# EAGLE board Welder_PSU.PCB (EAGLE 9.6.2), part 1 of 3
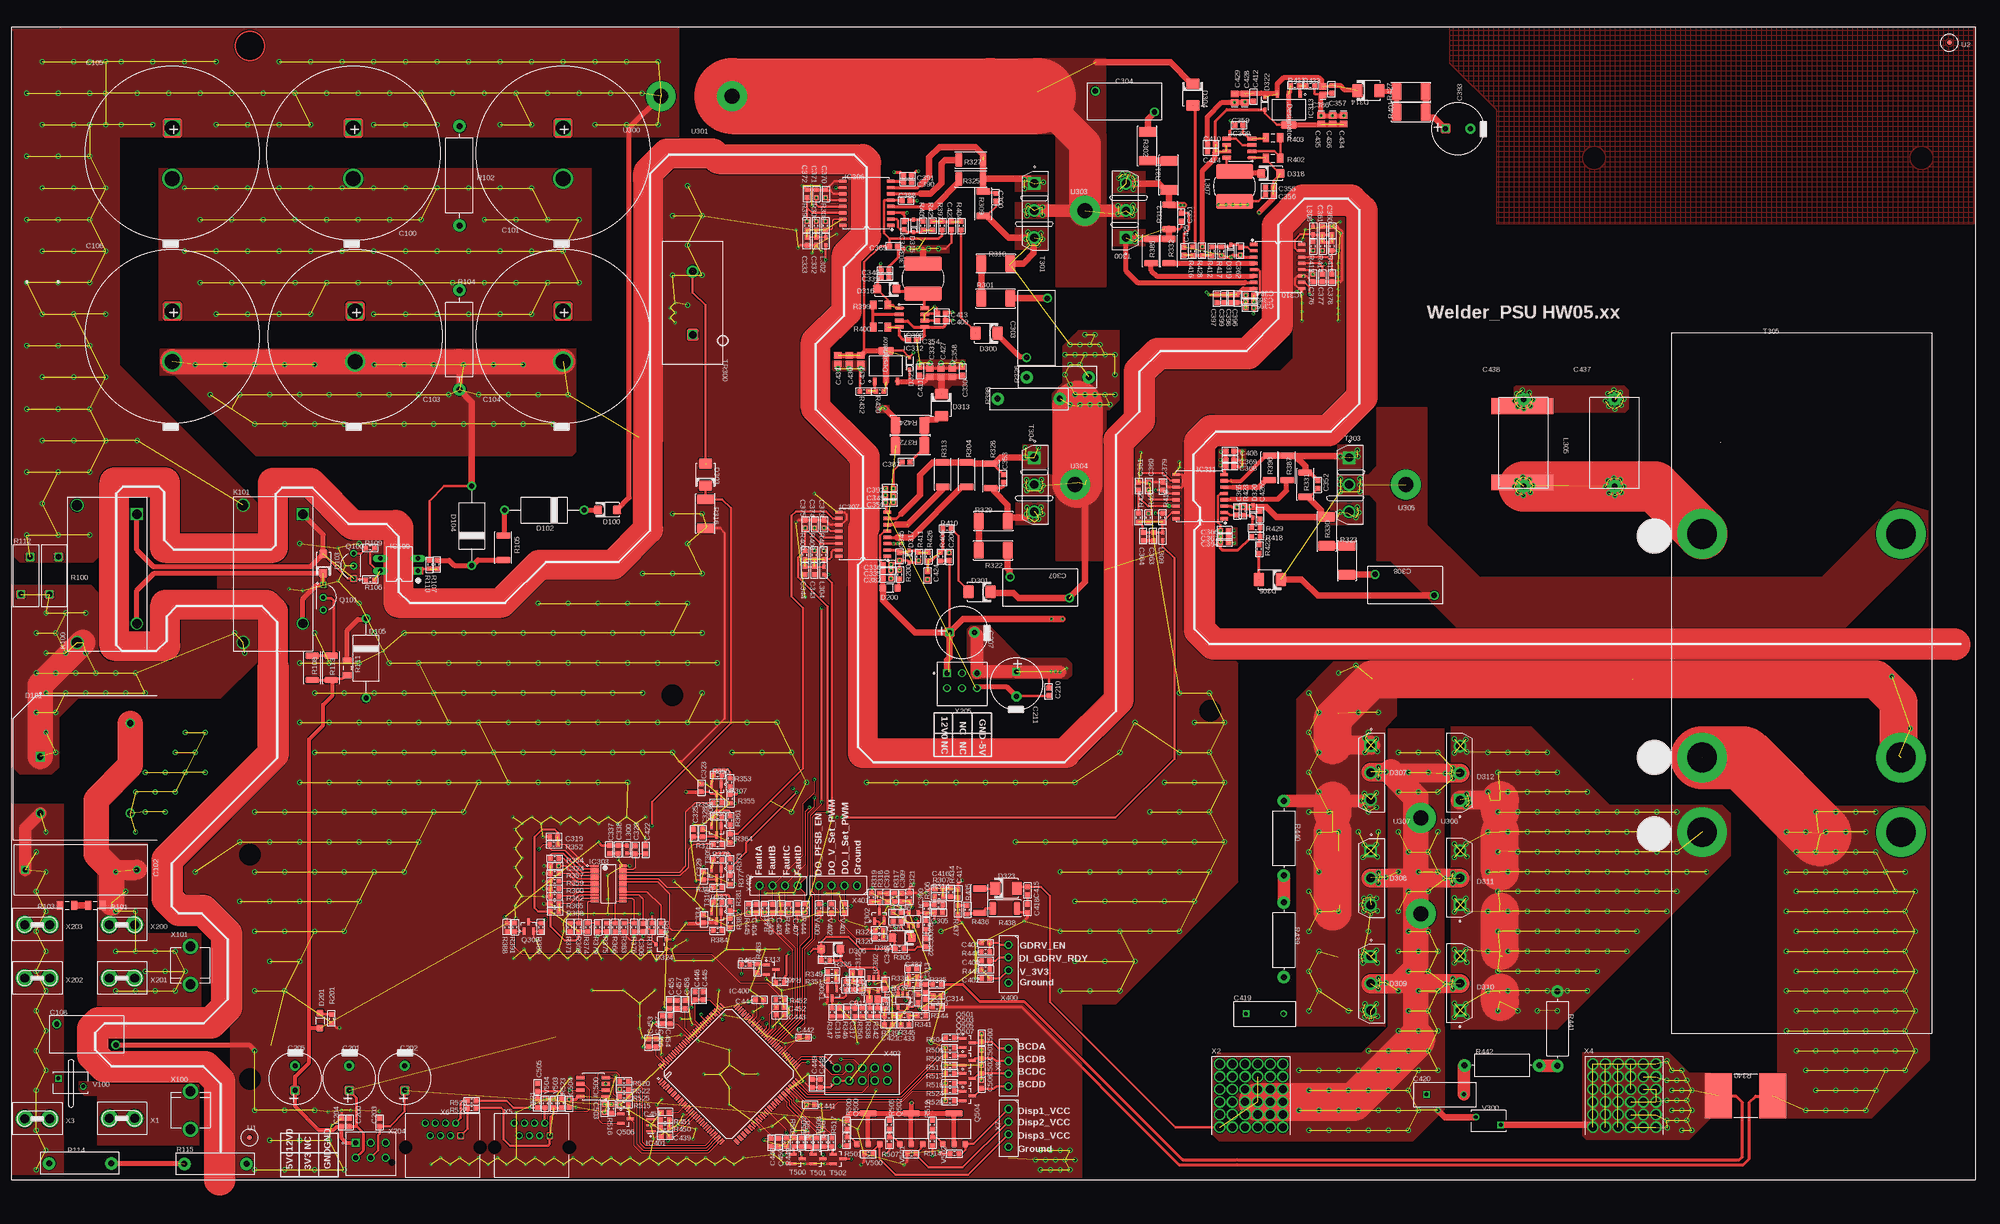
[diagram p0: board, top side]
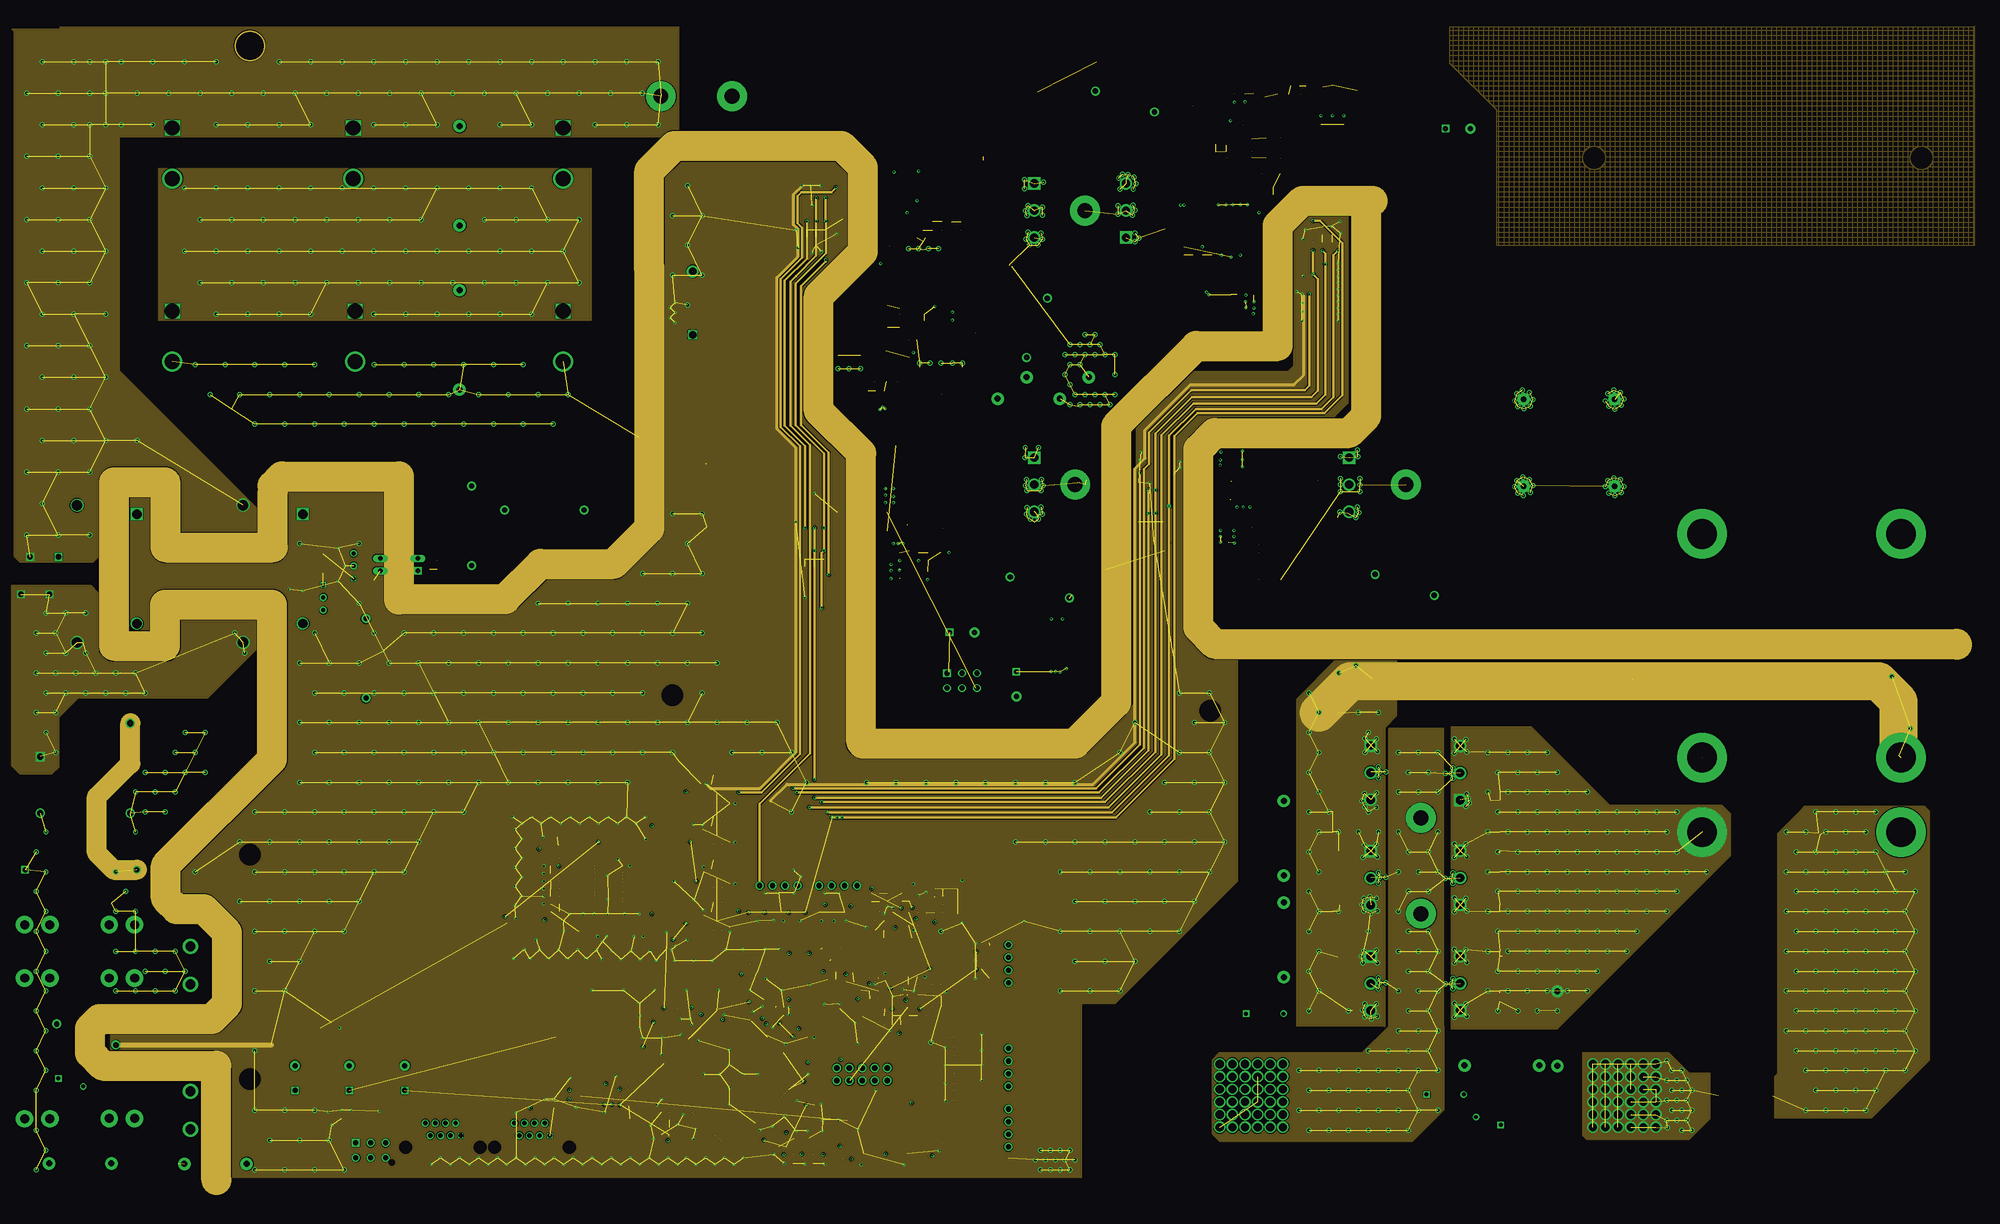
[diagram p1: board, inner layer Route2]
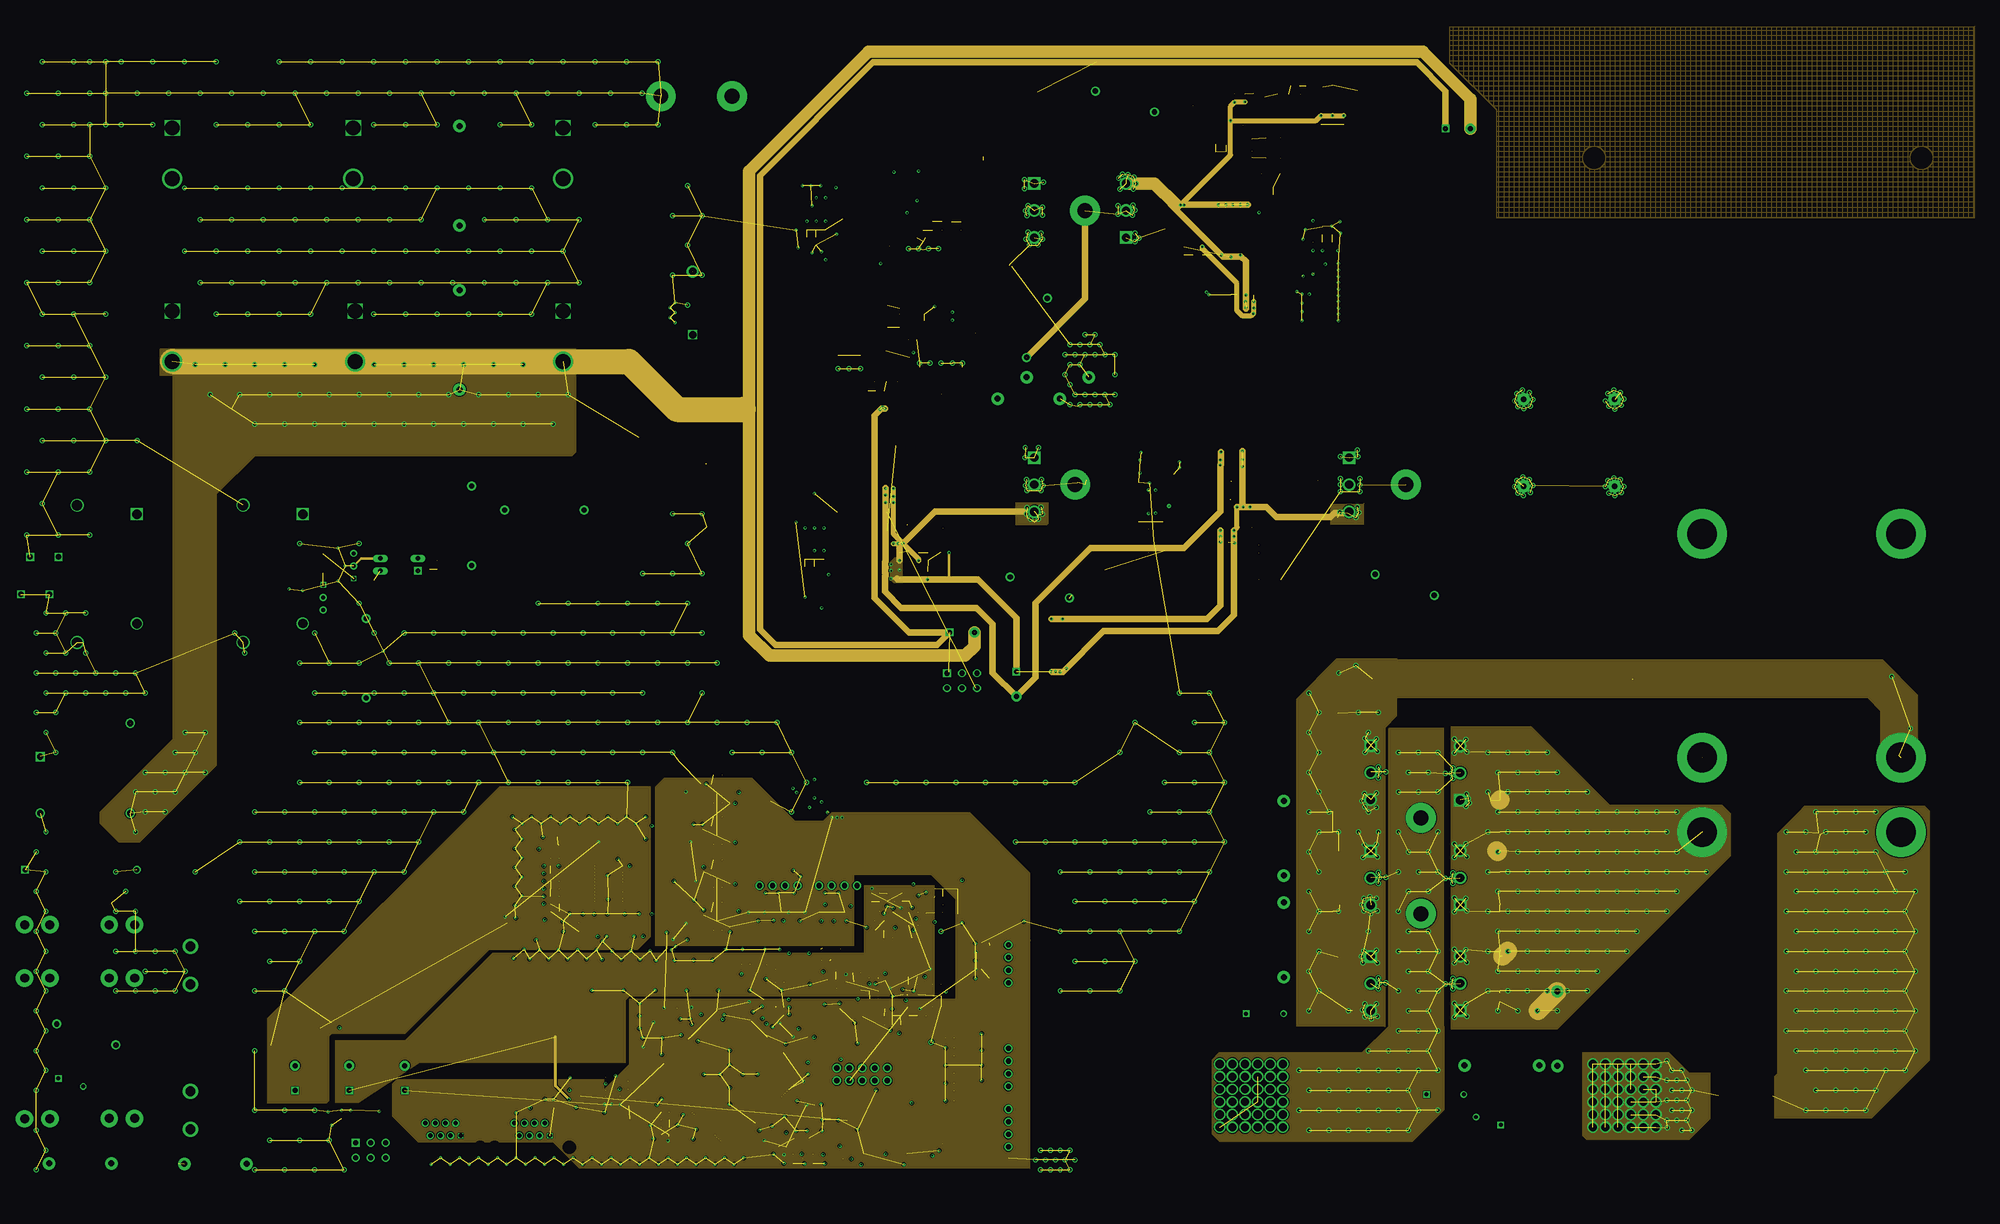
[diagram p2: board, inner layer Route3]
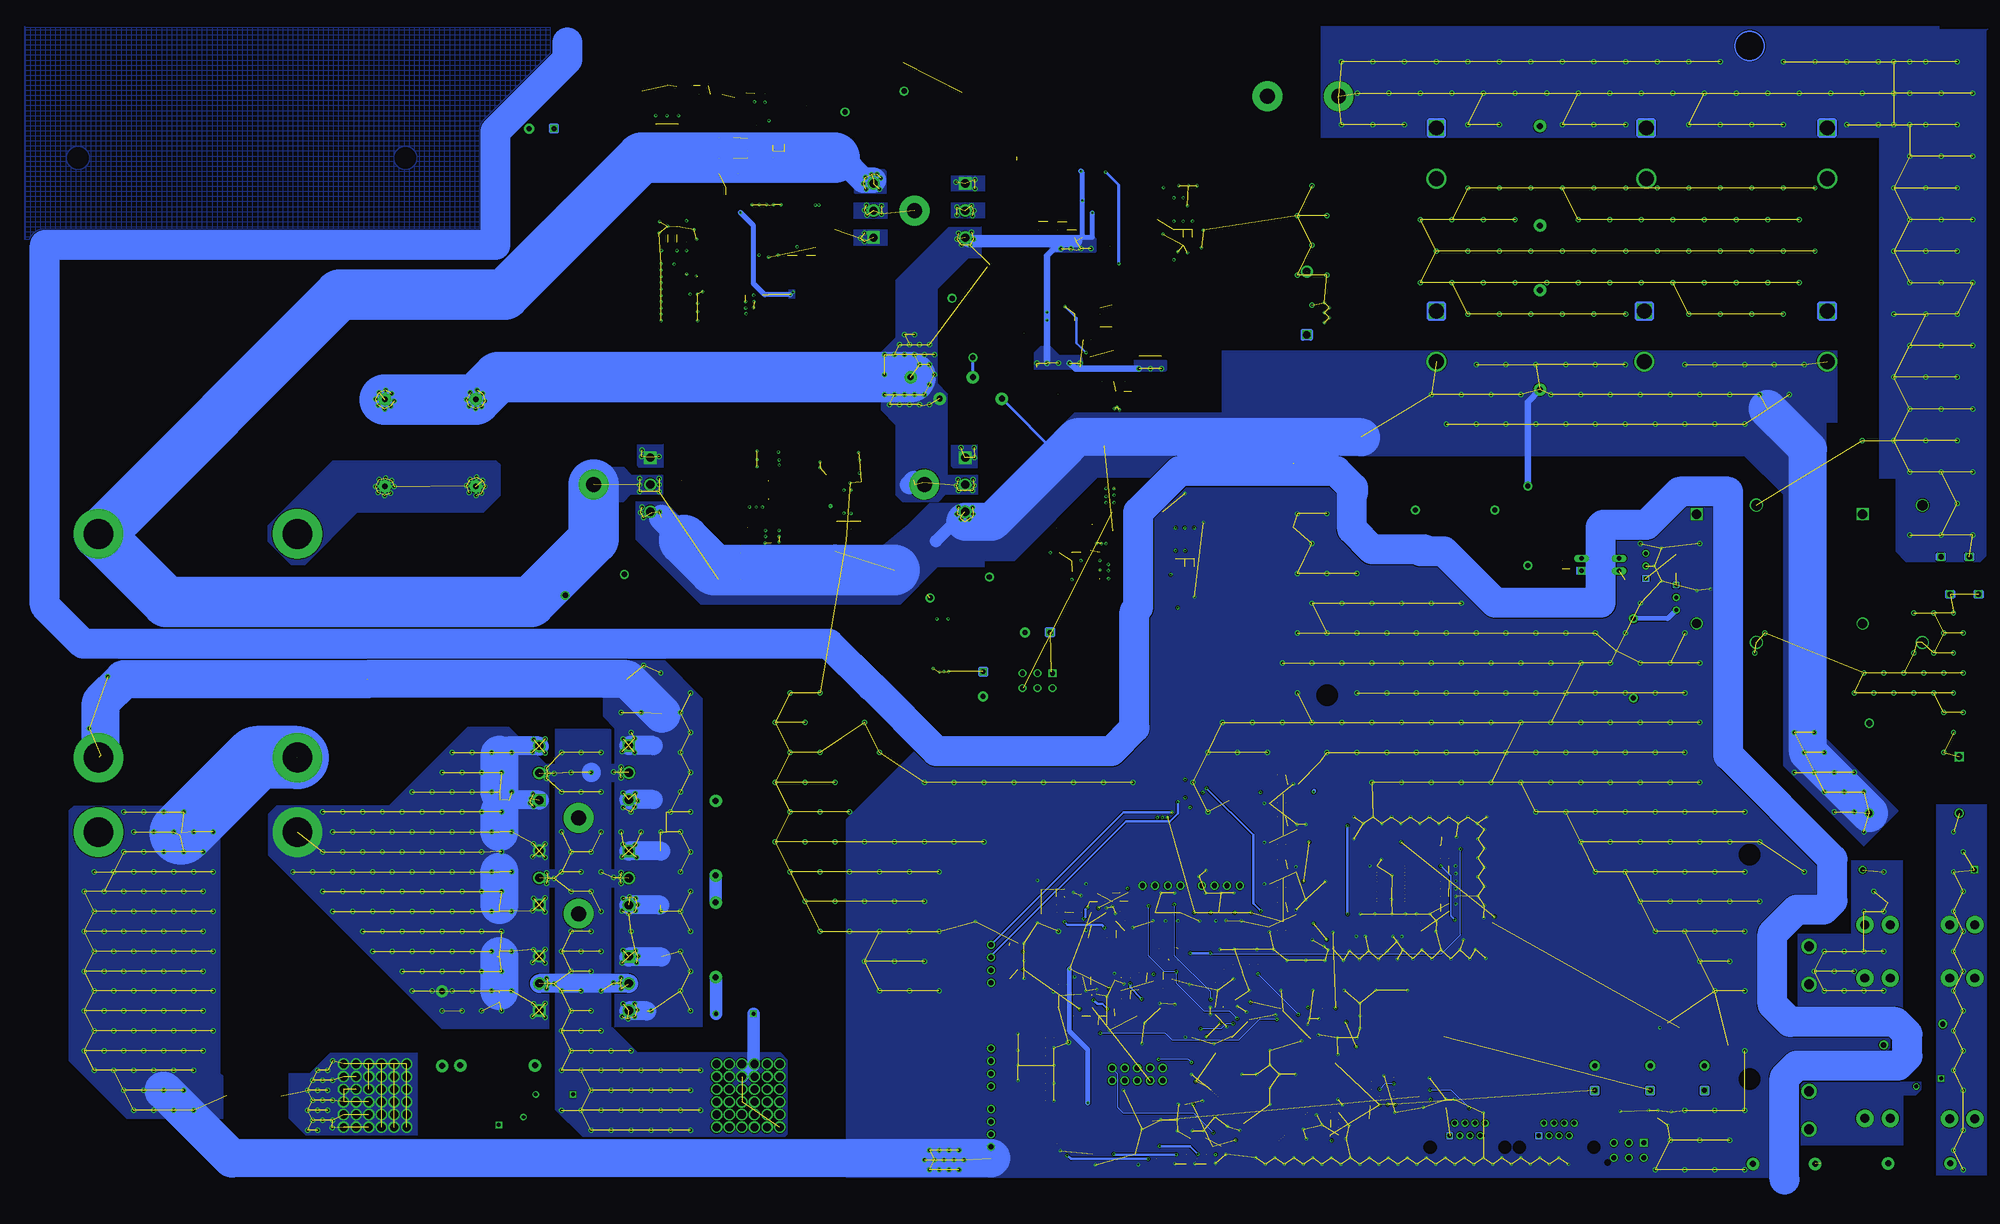
[diagram p3: board, bottom side, seen from below]

No outline drawn. Coordinates in mm, seen from the top.
Copper layers (1*16): Top 0.035mm / dielectric 1.5mm / Bottom 0.035mm
Design rules "Welder_PSU": minimum track width 6mil, minimum drill 0.35mm, track to track 6mil, track to pad 6mil, pad to pad 6mil, via to via 6mil, smd to smd 6mil, copper to edge 40mil, drill to drill 6mil, minimum pad ring 0mil, minimum via ring 0mil, stop-mask expansion 4mil, vias tented up to drill 0mil, thermal gap 10mil

## Footprints (pad centres in the part's own frame; a part is rotated, then mirrored left to right if it is on the bottom)
CAPACITOR-ELKO-400V-RM10-35X76PRIMARY = drill 3 pad 3.057 square: 1 -5.08,0 | drill 3 pad 4: 2 5.08,0
CP22.5X10X26.5_1PRIMARY = drill 1 pad 1.55 square: 1 -11.25,0 | drill 1 pad 1.55: 2 11.25,0
CAPACITOR-ELKO-400V-RM10-35X77PRIMARY = drill 3 pad 3.057 square: 1 -5.08,0 | drill 3 pad 4: 2 5.08,0
CAPACITOR-ELKO-400V-RM10-35X74PRIMARY = drill 3 pad 3.057 square: 1 -5.08,0 | drill 3 pad 4: 2 5.08,0
CAPACITOR-FILM-RM12.5MM-12MM_1PRIMARY = drill 1.1 pad 1.8: 1 6,-2.5; 2 -5.9,1.7
EIA0603_3PRIMARY = smd 1 x 1: 1 -0.8,0; 2 0.8,0
CAPACITOR-ELKO-RM5-10X20_6PRIMARY = drill 1 pad 1.538 square: 1 -2.5,0 | drill 1 pad 2: 2 2.5,0
CAPACITOR-ELKO-RM5-10X20_5PRIMARY = drill 1 pad 1.538 square: 1 -2.5,0 | drill 1 pad 2: 2 2.5,0
CAPACITOR-ELKO-RM5-10X20_4PRIMARY = drill 1 pad 1.538 square: 1 -2.5,0 | drill 1 pad 2: 2 2.5,0
CAPACITOR-ELKO-RM5-10X20_3PRIMARY = drill 1 pad 1.538 square: 1 -2.5,0 | drill 1 pad 2: 2 2.5,0
CAPACITOR-ELKO-RM5-10X20_2PRIMARY = drill 1 pad 1.538 square: 1 -2.5,0 | drill 1 pad 2: 2 2.5,0
EIA0805_1PRIMARY = smd 1.3 x 1.5: 1 -0.85,0; 2 0.85,0
CAPACITOR-ELKO-RM5-10X20_1PRIMARY = drill 1 pad 1.538 square: 1 -2.5,0 | drill 1 pad 2: 2 2.5,0
C_DISC_P7.5D12_1PRIMARY = drill 0.8 pad 1.3 square: 1 -3.75,0 | drill 0.8 pad 1.3: 2 3.75,0
CAPACITOR-FILM-RM17.5-28X17.55PRIMARY = drill 1.1 pad 2.5: 1 -8.75,0; 2 8.75,0
SMA_2PRIMARY = smd 1.75 x 1.75: 1 -1.925,0; 2 1.925,0
GBPC3510W_1PRIMARY = drill 1.25 pad 1.9 square: 1 2.35,9.05 | drill 1.25 pad 1.9: 2 9.05,-9.05; 3 -9.05,-9.05; 4 -9.05,9.05 | drill 5.59 pad 5.59: 5 0,0
DO-201AD_1PRIMARY = drill 1 pad 1.8: 1 -8,0; 2 8,0
1206LED_1PRIMARY = smd 1.4 x 1.5: 1 -1.5,0; 2 1.5,0
SMB_1PRIMARY = smd 2.16 x 2.74: 1 -2.21,0; 2 2.21,0
SMA_1PRIMARY = smd 1.75 x 1.75: 1 -1.925,0; 2 1.925,0
TO247-AD_1PRIMARY = drill 1.65 pad 2.5 square: 1 -0.22,5.44 | drill 1.65 pad 2.5: 2 -0.22,0; 3 -0.22,-5.44
SOD323_1PRIMARY = smd 0.6 x 0.8: 1 0,-1.25; 2 0,1.25
SOT23DUALDIODE_1PRIMARY = smd 0.8 x 0.9: 1 -0.95,-1.05; 2 0.95,-1.05; 3 0,1.05
P:EX157Y157D1571 = drill 4 pad 4: 1 0,0
DIP04_1PRIMARY = drill 0.9 pad 1.499 square: 1 -3.81,1.27 | drill 0.9 pad 1.499 long: 2 -3.81,-1.27; 3 3.81,-1.27; 4 3.81,1.27
SOT23-5_1PRIMARY = smd 0.6 x 0.99: 1 -0.953,-1.295; 2 0,-1.295; 3 0.953,-1.295 | smd 0.69 x 0.99: 4 0.953,1.295; 5 -0.953,1.295
TSSOP24_1PRIMARY = smd 1.655 x 0.381: 1 -2.825,3.575; 2 -2.825,2.925; 3 -2.825,2.275; 4 -2.825,1.625; 5 -2.825,0.975; 6 -2.825,0.325; 7 -2.825,-0.325; 8 -2.825,-0.975; 9 -2.825,-1.625; 10 -2.825,-2.275; 11 -2.825,-2.925; 12 -2.825,-3.575; 13 2.825,-3.575; 14 2.825,-2.925; 15 2.825,-2.275; 16 2.825,-1.625; 17 2.825,-0.975; 18 2.825,-0.325; 19 2.825,0.325; 20 2.825,0.975; 21 2.825,1.625; 22 2.825,2.275; 23 2.825,2.925; 24 2.825,3.575
SOIC16_WIDE_HV_1PRIMARY = smd 1.65 x 0.6: 1 -4.855,4.445; 2 -4.855,3.175; 3 -4.855,1.905; 4 -4.855,0.635; 5 -4.855,-0.635; 6 -4.855,-1.905; 7 -4.855,-3.175; 8 -4.855,-4.445; 9 4.855,-4.445; 10 4.855,-3.175; 11 4.855,-1.905; 12 4.855,-0.635; 13 4.855,0.635; 14 4.855,1.905; 15 4.855,3.175; 16 4.855,4.445
SOIC8_1PRIMARY = smd 1.9 x 0.72: 1 -2.54,1.905; 2 -2.54,0.635; 3 -2.54,-0.635; 4 -2.54,-1.905; 5 2.54,-1.905; 6 2.54,-0.635; 7 2.54,0.635; 8 2.54,1.905
SOT223_TI_1PRIMARY = smd 1.45 x 0.9: 1 -3.075,2.3; 3 -3.075,0; 4 -3.075,-2.3 | smd 1.45 x 3.15: 2 3.075,0
QFP-144-M_1PRIMARY = smd 1.45 x 0.3: 1 -10.725,8.75; 2 -10.725,8.25; 3 -10.725,7.75; 4 -10.725,7.25; 5 -10.725,6.75; 6 -10.725,6.25; 7 -10.725,5.75; 8 -10.725,5.25; 9 -10.725,4.75; 10 -10.725,4.25; 11 -10.725,3.75; 12 -10.725,3.25; 13 -10.725,2.75; 14 -10.725,2.25; 15 -10.725,1.75; 16 -10.725,1.25; 17 -10.725,0.75; 18 -10.725,0.25; 19 -10.725,-0.25; 20 -10.725,-0.75; 21 -10.725,-1.25; 22 -10.725,-1.75; 23 -10.725,-2.25; 24 -10.725,-2.75; 25 -10.725,-3.25; 26 -10.725,-3.75; 27 -10.725,-4.25; 28 -10.725,-4.75; 29 -10.725,-5.25; 30 -10.725,-5.75; 31 -10.725,-6.25; 32 -10.725,-6.75; 33 -10.725,-7.25; 34 -10.725,-7.75; 35 -10.725,-8.25; 36 -10.725,-8.75; 73 10.725,-8.75; 74 10.725,-8.25; 75 10.725,-7.75; 76 10.725,-7.25; 77 10.725,-6.75; 78 10.725,-6.25; 79 10.725,-5.75; 80 10.725,-5.25; 81 10.725,-4.75; 82 10.725,-4.25; 83 10.725,-3.75; 84 10.725,-3.25; 85 10.725,-2.75; 86 10.725,-2.25; 87 10.725,-1.75; 88 10.725,-1.25; 89 10.725,-0.75; 90 10.725,-0.25; 91 10.725,0.25; 92 10.725,0.75; 93 10.725,1.25; 94 10.725,1.75; 95 10.725,2.25; 96 10.725,2.75; 97 10.725,3.25; 98 10.725,3.75; 99 10.725,4.25; 100 10.725,4.75; 101 10.725,5.25; 102 10.725,5.75; 103 10.725,6.25; 104 10.725,6.75; 105 10.725,7.25; 106 10.725,7.75; 107 10.725,8.25; 108 10.725,8.75 | smd 0.3 x 1.45: 37 -8.75,-10.725; 38 -8.25,-10.725; 39 -7.75,-10.725; 40 -7.25,-10.725; 41 -6.75,-10.725; 42 -6.25,-10.725; 43 -5.75,-10.725; 44 -5.25,-10.725; 45 -4.75,-10.725; 46 -4.25,-10.725; 47 -3.75,-10.725; 48 -3.25,-10.725; 49 -2.75,-10.725; 50 -2.25,-10.725; 51 -1.75,-10.725; 52 -1.25,-10.725; 53 -0.75,-10.725; 54 -0.25,-10.725; 55 0.25,-10.725; 56 0.75,-10.725; 57 1.25,-10.725; 58 1.75,-10.725; 59 2.25,-10.725; 60 2.75,-10.725; 61 3.25,-10.725; 62 3.75,-10.725; 63 4.25,-10.725; 64 4.75,-10.725; 65 5.25,-10.725; 66 5.75,-10.725; 67 6.25,-10.725; 68 6.75,-10.725; 69 7.25,-10.725; 70 7.75,-10.725; 71 8.25,-10.725; 72 8.75,-10.725; 109 8.75,10.725; 110 8.25,10.725; 111 7.75,10.725; 112 7.25,10.725; 113 6.75,10.725; 114 6.25,10.725; 115 5.75,10.725; 116 5.25,10.725; 117 4.75,10.725; 118 4.25,10.725; 119 3.75,10.725; 120 3.25,10.725; 121 2.75,10.725; 122 2.25,10.725; 123 1.75,10.725; 124 1.25,10.725; 125 0.75,10.725; 126 0.25,10.725; 127 -0.25,10.725; 128 -0.75,10.725; 129 -1.25,10.725; 130 -1.75,10.725; 131 -2.25,10.725; 132 -2.75,10.725; 133 -3.25,10.725; 134 -3.75,10.725; 135 -4.25,10.725; 136 -4.75,10.725; 137 -5.25,10.725; 138 -5.75,10.725; 139 -6.25,10.725; 140 -6.75,10.725; 141 -7.25,10.725; 142 -7.75,10.725; 143 -8.25,10.725; 144 -8.75,10.725
RESONATOR_CSTNE8M00G520000R0_1PRIMARY = smd 0.4 x 1.9: 1 -1.2,0; 2 0,0; 3 1.2,0
ALFG2PF09_1PRIMARY = drill 1.9 pad 2.4 square: 1 0,0 | drill 1.9 pad 2.4: 2 22,0 | drill 2.1 pad 2.6: 3 -1.8,-12; 4 25.8,-12
FERRITE_SMD_0603_1PRIMARY = smd 0.85 x 0.7: 1 -0.775,0; 2 0.775,0
SRN8040TA_1PRIMARY = smd 3 x 7.5: 1 -3,0; 2 3,0
SRP1770TA_1PRIMARY = smd 3.15 x 12.5: 1 -7.675,0; 2 7.675,0
TO-92_1PRIMARY = drill 0.8 pad 1.071 square: 1 0,2.54 | drill 0.8 pad 1.4: 2 0,0; 3 0,-2.54
SOT23-3N_1PRIMARY = smd 1.5 x 0.6: 1 -0.95,0.95; 2 -0.95,-0.95; 3 0.95,0
SOT223_1PRIMARY = smd 1.2 x 1.4: 1 -2.3,-3.1; 3 0,-3.1; 4 2.3,-3.1 | smd 3.5 x 1.4: 2 0,3.1
SOT23-3N_2PRIMARY = smd 1.5 x 0.6: 1 -0.95,0.95; 2 -0.95,-0.95; 3 0.95,0
NTC_D10_P7.5_1PRIMARY = drill 1.1 pad 1.538 square: 1 -3.75,0.925; 2 3.75,-0.925
EIA1206_1PRIMARY = smd 1.3 x 1.8: 1 -1.45,0; 2 1.45,0
RES-RM20-RSF2W_1PRIMARY = drill 1.2 pad 2.5: 1 -10,0; 2 10,0
2010RESISTOR_1PRIMARY = smd 1.4 x 2.8: 1 -2.45,0; 2 2.45,0
EIA0603_2PRIMARY = smd 0.9 x 1: 1 -0.85,0; 2 0.85,0
RES-RM12.5-VR37_1PRIMARY = drill 1.2 pad 2.5: 1 -6.25,0; 2 6.25,0
2512RESISTOR_1PRIMARY = smd 2 x 3.5: 1 -2.9,0; 2 2.9,0
WSLP3921L_1PRIMARY = smd 5.4 x 9: 1 -5.5,0; 2 5.5,0
EIA0603_1PRIMARY = smd 0.9 x 1: 1 -0.85,0; 2 0.85,0
RES-RM15-RSF1W_1PRIMARY = drill 1.2 pad 2.5: 1 -7.5,0; 2 7.5,0
TO247-AC_2PRIMARY = drill 1.65 pad 2.5 square: 1 -0.22,5.44 | drill 1.65 pad 2.5: 2 -0.22,0; 3 -0.22,-5.44
TO247-AC_1PRIMARY = drill 1.65 pad 2.5 square: 1 -0.22,5.44 | drill 1.65 pad 2.5: 2 -0.22,0; 3 -0.22,-5.44
11-0060-A_1PRIMARY = drill 6 pad 10: 1 -20,30; 2 -20,-15; 3 -20,-30; 4 20,-30; 5 20,-15; 6 20,30
CST206-2A_1PRIMARY = drill 1.5 pad 1.83 square: 1 -6.35,0 | drill 1.5 pad 2.4: 2 6.35,0
FIDUCIALMARKER_1PRIMARY = smd 1 x 1: 1 0,0
PAD-3.0X6.0MM_7PRIMARY = drill 3 pad 6: 1 15.087,0
PAD-3.0X6.0MM_6PRIMARY = drill 3 pad 6: 1 0,15.31
PAD-3.0X6.0MM_5PRIMARY = drill 3 pad 6: 1 0.105,17.636
PAD-3.0X6.0MM_4PRIMARY = drill 3 pad 6: 1 3.96,8.553
PAD-3.0X6.0MM_3PRIMARY = drill 3 pad 6: 1 40,0
PAD-3.0X6.0MM_2PRIMARY = drill 3 pad 6: 1 1,0
PAD-3.0X6.0MM_1PRIMARY = drill 3 pad 6: 1 10,-19.25
EPCOS_B72205S0271K101_1PRIMARY = drill 0.8 pad 1.3 square: 1 -2.5,0.8 | drill 0.8 pad 1.3: 2 2.5,-0.8
X01_FASTONPCBTAB6.3MM1.8MMHO87PRIMARY = drill 1.8 pad 3.5: 1 2.539,-0.001; 2 -2.541,-0.001
X01_M10_7461061_1PRIMARY = drill 1.65 pad 2.3: 1 6.35,6.35; 2 3.81,6.35; 3 1.27,6.35; 4 -1.27,6.35; 5 -3.81,6.35; 6 -6.35,6.35; 7 6.35,3.81; 8 6.35,1.27; 9 6.35,-6.35; 10 6.35,-3.81; 11 6.35,-1.27; 12 -6.35,3.81; 13 -3.81,3.81; 14 -1.27,3.81; 15 1.27,3.81; 16 3.81,3.81; 17 3.81,1.27; 18 3.81,-1.27; 19 3.81,-3.81; 20 3.81,-6.35; 21 1.27,1.27; 22 -1.27,1.27; 23 -3.81,1.27; 24 -6.35,1.27; 25 1.27,-1.27; 26 -1.27,-1.27; 27 -3.81,-1.27; 28 -6.35,-1.27; 29 1.27,-3.81; 30 -1.27,-3.81; 31 -3.81,-3.81; 32 -6.35,-3.81; 33 1.27,-6.35; 34 -1.27,-6.35; 35 -3.81,-6.35; 36 -6.35,-6.35
X08_615008148521_1PRIMARY = drill 0.9 pad 1.071 square: 1 3.57,1.875 | drill 0.9 pad 1.4: 2 2.55,4.415; 3 1.53,1.875; 4 0.51,4.415; 5 -0.51,1.875; 6 -1.53,4.415; 7 -2.55,1.875; 8 -3.57,4.415 | drill 2.36 pad 2.36: 9 7.5,-0.425; 10 -7.5,-0.425
X04_100MIL_1PRIMARY = drill 1.016 pad 1.616: 1 0,0; 2 2.54,0; 3 5.08,0; 4 7.62,0
FUSE_CLIP_01020071Z_1PRIMARY = drill 1.98 pad 3.03: 1 -3.81,0; 2 3.81,0
X06_MOLEX_MICROFIT_1PRIMARY = drill 1.02 pad 1.57 square: 1 3,-2.2 | drill 1.02 pad 1.57: 2 3,0.8; 3 0,-2.2; 4 0,0.8; 5 -3,-2.2; 6 -3,0.8 | drill 1.02 pad 1.02: 7 -4.28,1.78
X10_100MIL_2XROW_VERT_1PRIMARY = drill 1.1 pad 1.7: 1 -5.08,1.27; 2 -5.08,-1.27; 3 -2.54,1.27; 4 -2.54,-1.27; 5 0,1.27; 6 0,-1.27; 7 2.54,1.27; 8 2.54,-1.27; 9 5.08,1.27; 10 5.08,-1.27

## Placement (x,y rotation side)
C100  1500µF/250V  [CAPACITOR-ELKO-400V-RM10-35X76PRIMARY]  103.82,239.41 270 top
C101  1500µF/250V  [CAPACITOR-ELKO-400V-RM10-35X76PRIMARY]  145.98,239.41 270 top
C102  470nF/275AC  [CP22.5X10X26.5_1PRIMARY]  49.04,95.27 0 top
C103  1500µF/250V  [CAPACITOR-ELKO-400V-RM10-35X76PRIMARY]  104.2,202.58 270 top
C104  1500µF/250V  [CAPACITOR-ELKO-400V-RM10-35X77PRIMARY]  145.98,202.58 270 top
C105  1500µF/250V  [CAPACITOR-ELKO-400V-RM10-35X74PRIMARY]  67.42,239.41 270 top
C106  1500µF/250V  [CAPACITOR-ELKO-400V-RM10-35X74PRIMARY]  67.42,202.58 270 top
C108  470pF/760V  [CAPACITOR-FILM-RM12.5MM-12MM_1PRIMARY]  50.16,61.74 180 top
C200  100nF/50V  [EIA0603_3PRIMARY]  103,44.47 270 top
C201  470µF  [CAPACITOR-ELKO-RM5-10X20_6PRIMARY]  103,53.36 90 top
C202  470µF  [CAPACITOR-ELKO-RM5-10X20_5PRIMARY]  114.17,53.36 90 top
C203  100nF/50V  [EIA0603_3PRIMARY]  109.09,44.47 270 top
C204  100nF/50V  [EIA0603_3PRIMARY]  101.47,44.47 270 top
C205  470µF  [CAPACITOR-ELKO-RM5-10X20_4PRIMARY]  92.08,53.36 90 top
C206  100nF/50V  [EIA0603_3PRIMARY]  223.65,158.26 270 top
C207  470µF  [CAPACITOR-ELKO-RM5-10X20_3PRIMARY]  226.24,143.02 0 top
C210  100nF/50V  [EIA0603_3PRIMARY]  243.71,131.08 90 top
C211  470µF  [CAPACITOR-ELKO-RM5-10X20_2PRIMARY]  237.16,132.61 270 top
C300  470pF/50V  [EIA0603_3PRIMARY]  233.04,230.52 90 top
C301  470pF/50V  [EIA0603_3PRIMARY]  213.16,84.9 0 top
C302  22nF/50V  [EIA0603_3PRIMARY]  219,80.58 270 top
C303  470pF/15KV  [CAPACITOR-FILM-RM12.5MM-12MM_1PRIMARY]  240.92,204.23 90 top
C304  470pF/15KV  [CAPACITOR-FILM-RM12.5MM-12MM_1PRIMARY]  258.95,250.21 0 top
C305  100nF/50V  [EIA0603_3PRIMARY]  221.54,86.67 180 top
C306  330pF/50V  [EIA0603_3PRIMARY]  162.1,83.69 90 top
C307  470pF/15KV  [CAPACITOR-FILM-RM12.5MM-12MM_1PRIMARY]  241.94,151.66 180 top
C308  470pF/15KV  [CAPACITOR-FILM-RM12.5MM-12MM_1PRIMARY]  315.34,152.16 180 top
C309  100nF/50V  [EIA0603_3PRIMARY]  214.18,89.72 270 top
C310  100nF/50V  [EIA0603_3PRIMARY]  211.13,89.72 90 top
C311  12pF/50V  [EIA0603_3PRIMARY]  204.42,71.97 90 top
C312  510pF/50V  [EIA0603_3PRIMARY]  205.06,74.51 180 top
C313  10nF/50V  [EIA0603_3PRIMARY]  218.9,71.46 90 top
C314  1nF/50V  [EIA0603_3PRIMARY]  221.19,69.93 180 top
C315  22uF/16V  [EIA0805_1PRIMARY]  208.45,69.28 0 top
C316  10nF/50V  [EIA0603_3PRIMARY]  218.9,68.41 90 top
C317  100nF/50V  [EIA0603_3PRIMARY]  204.68,66.63 90 top
C318  100nF/50V  [EIA0603_3PRIMARY]  201.63,66.63 270 top
C319  1uF/25V  [EIA0603_3PRIMARY]  144.15,101.87 180 top
C320  1uF/25V  [EIA0603_3PRIMARY]  160.5,99.28 270 top
C323  100nF/50V  [EIA0603_3PRIMARY]  173.78,111.77 270 top
C324  100nF/50V  [EIA0603_3PRIMARY]  144.32,96.02 180 top
C325  1uF/50V  [EIA0603_3PRIMARY]  172.26,102.63 270 top
C328  100nF/50V  [EIA0603_3PRIMARY]  174.04,102.63 270 top
C329  100nF/50V  [EIA0603_3PRIMARY]  174.29,93.99 270 top
C330  100nF/50V  [EIA0603_3PRIMARY]  226.34,195.57 270 top
C331  10uF/50V  [EIA0805_1PRIMARY]  219.74,195.32 270 top
C332  100nF/50V  [EIA0603_3PRIMARY]  196.93,221.7 90 top
C333  1uF/50V  [EIA0603_3PRIMARY]  195.03,221.7 90 top
C334  100nF/50V  [EIA0603_3PRIMARY]  174.29,85.36 270 top
C335  100nF/50V  [EIA0603_3PRIMARY]  211.19,155.42 180 top
C336  10uF/50V  [EIA0603_3PRIMARY]  211.19,156.69 180 top
C337  1uF/50V  [EIA0603_3PRIMARY]  155.32,99.33 90 top
C338  100nF/50V  [EIA0603_3PRIMARY]  157.1,99.33 90 top
C339  10uF/35V  [EIA0603_3PRIMARY]  210.72,214.49 180 top
C340  100nF/50V  [EIA0603_3PRIMARY]  210.72,215.76 180 top
C342  1nF/50V  [EIA0603_3PRIMARY]  214.63,224.81 270 top
C343  100nF/50V  [EIA0603_3PRIMARY]  196.58,155.42 90 top
C344  1uF/50V  [EIA0603_3PRIMARY]  194.68,155.42 90 top
C345  1nF/50V  [EIA0603_3PRIMARY]  213.7,158.28 90 top
C346  100nF/50V  [EIA0603_3PRIMARY]  213.16,86.67 0 top
C347  100nF/50V  [EIA0603_3PRIMARY]  217.38,69.43 270 top
C348  100nF/50V  [EIA0603_3PRIMARY]  210.77,72.22 270 top
C349  100nF/50V  [EIA0603_3PRIMARY]  211.66,170.39 180 top
C350  2.2uF/50V  [EIA0603_3PRIMARY]  211.66,169.12 180 top
C351  470pF/50V  [EIA0603_3PRIMARY]  270.38,226.59 90 top
C352  330pF/50V  [EIA0603_3PRIMARY]  297.81,172.74 270 top
C353  330pF/50V  [EIA0603_3PRIMARY]  234.57,174.01 90 top
C354  100nF/50V  [EIA0603_3PRIMARY]  216.28,201.95 180 top
C355  10uF/35V  [EIA0603_3PRIMARY]  288.06,232.6 0 top
C356  4.7uF/25V  [EIA0603_3PRIMARY]  288.06,231.08 0 top
C357  100nF/50V  [EIA0603_3PRIMARY]  300.61,252.24 90 top
C358  10uF/50V  [EIA0805_1PRIMARY]  224.31,195.32 270 top
C359  100nF/50V  [EIA0603_3PRIMARY]  281.96,245.05 0 top
C360  1uF/50V  [EIA0603_3PRIMARY]  300.66,223.86 270 top
C361  100nF/50V  [EIA0603_3PRIMARY]  298.75,223.86 270 top
C362  1nF/50V  [EIA0603_3PRIMARY]  282.21,219.73 90 top
C363  100nF/50V  [EIA0603_3PRIMARY]  264.72,162.32 90 top
C364  1uF/50V  [EIA0603_3PRIMARY]  262.74,162.32 90 top
C365  1nF/50V  [EIA0603_3PRIMARY]  281.55,167.41 270 top
C366  100nF/50V  [EIA0603_3PRIMARY]  279.03,163.53 180 top
C367  10uF/35V  [EIA0603_3PRIMARY]  279.03,162.26 180 top
C368  100nF/50V  [EIA0603_3PRIMARY]  280.12,176.42 180 top
C369  2.2uF/35V  [EIA0603_3PRIMARY]  280.12,177.69 180 top
C370  100pF/50V  [EIA0603_3PRIMARY]  198.84,231.23 270 top
C371  100pF/50V  [EIA0603_3PRIMARY]  196.93,231.23 270 top
C372  100pF/50V  [EIA0603_3PRIMARY]  195.03,231.23 270 top
C373  100pF/50V  [EIA0603_3PRIMARY]  198.49,164.82 270 top
C374  100pF/50V  [EIA0603_3PRIMARY]  196.58,164.82 270 top
C375  100pF/50V  [EIA0603_3PRIMARY]  194.68,164.82 270 top
C376  100pF/50V  [EIA0603_3PRIMARY]  296.85,214.33 90 top
C377  100pF/50V  [EIA0603_3PRIMARY]  298.75,214.33 90 top
C378  100pF/50V  [EIA0603_3PRIMARY]  300.66,214.33 90 top
C379  100pF/50V  [EIA0603_3PRIMARY]  266.63,172.42 270 top
C380  100pF/50V  [EIA0603_3PRIMARY]  263.78,172.48 270 top
C381  100pF/50V  [EIA0603_3PRIMARY]  261.75,172.48 270 top
C382  10uF/35V  [EIA0603_3PRIMARY]  211.16,153.83 180 top
C383  100pF/25V  [EIA0603_3PRIMARY]  216.33,75.37 0 top
C384  4.7uF/50V  [EIA0603_3PRIMARY]  284.11,210.84 180 top
C385  100nF/50V  [EIA0603_3PRIMARY]  284.11,209.57 0 top
C386  10uF/50V  [EIA0805_1PRIMARY]  298.83,251.99 90 top
C387  100nF/100V  [EIA0603_3PRIMARY]  215.01,177.31 0 top
C388  10uF/25V  [EIA0603_3PRIMARY]  215.01,229.89 0 top
C389  10uF/25V  [EIA0603_3PRIMARY]  212.47,220.74 0 top
C390  10uF/25V  [EIA0603_3PRIMARY]  215.32,233.61 0 top
C391  10uF/25V  [EIA0603_3PRIMARY]  215.32,234.88 0 top
C392  10uF/35V  [EIA0603_3PRIMARY]  211.66,171.99 180 top
C393  470µF  [CAPACITOR-ELKO-RM5-10X20_1PRIMARY]  326.01,244.37 0 top
C394  10uF/35V  [EIA0603_3PRIMARY]  279.01,161.06 180 top
C395  10uF/25V  [EIA0603_3PRIMARY]  284.11,208.3 180 top
C396  10uF/25V  [EIA0603_3PRIMARY]  281.57,210.2 270 top
C397  10uF/25V  [EIA0603_3PRIMARY]  277.5,210.2 270 top
C398  10uF/35V  [EIA0603_3PRIMARY]  280.3,210.2 90 top
C399  10uF/35V  [EIA0603_3PRIMARY]  279.03,210.2 90 top
C400  100nF/50V  [EIA0603_3PRIMARY]  231.01,76.98 0 top
C401  100nF/50V  [EIA0603_3PRIMARY]  231.01,80.54 0 top
C402  100nF/50V  [EIA0603_3PRIMARY]  231.01,73.42 0 top
C403  100nF/50V  [EIA0603_3PRIMARY]  189.87,87.5 90 top
C404  100nF/50V  [EIA0603_3PRIMARY]  184.79,87.5 90 top
C405  100nF/50V  [EIA0603_3PRIMARY]  188.09,87.5 90 top
C407  100nF/50V  [EIA0603_3PRIMARY]  193.18,87.5 90 top
C408  10uF/35V  [EIA0603_3PRIMARY]  280.12,179.47 180 top
C409  4.7uF/50V  [EIA0603_3PRIMARY]  222.12,205.76 180 top
C410  4.7uF/50V  [EIA0603_3PRIMARY]  276.37,241.24 0 top
C411  100nF/50V  [EIA0603_3PRIMARY]  217.7,195.57 270 top
C412  100nF/50V  [EIA0603_3PRIMARY]  284.88,250.71 90 top
C413  100nF/50V  [EIA0603_3PRIMARY]  222.12,207.28 180 top
C414  100nF/50V  [EIA0603_3PRIMARY]  276.37,239.72 0 top
C415  100nF/100V  [EIA0603_3PRIMARY]  239.45,91.05 90 top
C416  10uF/25V  [EIA0603_3PRIMARY]  221.62,91.46 0 top
C417  10uF/25V  [EIA0603_3PRIMARY]  225.48,90.54 270 top
C418  100nF/100V  [EIA0603_3PRIMARY]  239.45,87.49 90 top
C419  1nF/3KV  [C_DISC_P7.5D12_1PRIMARY]  287.15,66.31 0 top
C420  1nF/3KV  [C_DISC_P7.5D12_1PRIMARY]  323.4,50.06 0 top
C421  220nF/25V  [EIA0603_3PRIMARY]  211.45,64.11 180 top
C422  100nF/50V  [EIA0603_3PRIMARY]  162.6,99.28 270 top
C423  330pF/50V  [EIA0603_3PRIMARY]  224.16,224.81 270 top
C424  330pF/50V  [EIA0603_3PRIMARY]  219.33,154.45 90 top
C425  330pF/50V  [EIA0603_3PRIMARY]  270.92,219.73 270 top
C426  330pF/50V  [EIA0603_3PRIMARY]  286.13,166.64 270 top
C427  10uF/50V  [EIA0805_1PRIMARY]  222.02,195.32 270 top
C428  10uF/50V  [EIA0805_1PRIMARY]  283.1,250.51 90 top
C429  10uF/50V  [EIA0805_1PRIMARY]  281.07,250.51 90 top
C430  10uF/50V  [EIA0805_1PRIMARY]  203.58,197.88 90 top
C431  10uF/50V  [EIA0805_1PRIMARY]  201.29,197.88 90 top
C432  10uF/50V  [EIA0805_1PRIMARY]  205.87,197.88 90 top
C433  100pF/25V  [EIA0603_3PRIMARY]  214.75,64.11 180 top
C434  10uF/50V  [EIA0805_1PRIMARY]  303.04,246.12 270 top
C435  10uF/50V  [EIA0805_1PRIMARY]  298.47,246.12 270 top
C436  10uF/50V  [EIA0805_1PRIMARY]  300.75,246.12 270 top
C437  2.4uF/400V  [CAPACITOR-FILM-RM17.5-28X17.55PRIMARY]  357.5,181.12 90 top
C438  2.4uF/400V  [CAPACITOR-FILM-RM17.5-28X17.55PRIMARY]  339.22,181.12 90 top
C439  100nF/50V  [EIA0603_3PRIMARY]  166.5,41.67 180 top
C440  100nF/50V  [EIA0603_3PRIMARY]  187.86,40.4 270 top
C441  100nF/50V  [EIA0603_3PRIMARY]  195.74,48.02 0 top
C442  100nF/50V  [EIA0603_3PRIMARY]  194.4,61.56 0 top
C443  100nF/50V  [EIA0603_3PRIMARY]  189.61,66.06 0 top
C444  100nF/50V  [EIA0603_3PRIMARY]  185.55,69.11 0 top
C445  100nF/50V  [EIA0603_3PRIMARY]  174.12,69.87 90 top
C446  100nF/50V  [EIA0603_3PRIMARY]  172.59,69.87 90 top
C447  100nF/50V  [EIA0603_3PRIMARY]  164.72,60.47 90 top
C448  1uF/16V  [EIA0603_3PRIMARY]  197.74,52.34 270 top
C449  100nF/50V  [EIA0603_3PRIMARY]  196.22,52.34 270 top
C450  100nF/50V  [EIA0603_3PRIMARY]  189.38,40.4 90 top
C451  100nF/50V  [EIA0603_3PRIMARY]  166.52,46.5 180 top
C452  100nF/50V  [EIA0603_3PRIMARY]  189.61,67.58 0 top
C453  1uF/16V  [EIA0603_3PRIMARY]  163.2,60.47 270 top
C454  1uF/16V  [EIA0603_3PRIMARY]  167.51,65.04 270 top
C455  1uF/16V  [EIA0603_3PRIMARY]  167.45,68.24 270 top
C456  100nF/50V  [EIA0603_3PRIMARY]  165.99,65.04 90 top
C457  100nF/50V  [EIA0603_3PRIMARY]  168.98,68.24 90 top
C458  10uF/16V  [EIA0603_3PRIMARY]  170.5,68.24 270 top
C500  100nF/100V  [EIA0603_3PRIMARY]  230.17,61.47 270 top
C501  100nF/100V  [EIA0603_3PRIMARY]  230.17,58.17 270 top
C502  100nF/100V  [EIA0603_3PRIMARY]  230.17,55.12 270 top
C503  100nF/25V  [EIA0603_3PRIMARY]  154.33,47.26 270 top
C504  100nF/25V  [EIA0603_3PRIMARY]  147.19,48.28 270 top
C505  100nF/100V  [EIA0603_3PRIMARY]  140.84,51.54 270 top
C506  100nF/100V  [EIA0603_3PRIMARY]  230.17,52.07 270 top
D100  RS1M-13-F  [SMA_2PRIMARY]  154.94,167.66 180 top
D101  GBPC3510W  [GBPC3510W_1PRIMARY]  49.9,115.68 90 top
D102  1N5387BRLG  [DO-201AD_1PRIMARY]  142.24,167.66 0 top
D103  RS1M-13-F  [SMA_2PRIMARY]  97.79,156.86 270 top
D104  9.1V  [DO-201AD_1PRIMARY]  127.64,164.48 270 top
D105  9.1V  [DO-201AD_1PRIMARY]  106.36,137.79 90 top
D200  26-21/GPC-F3138B/CA  [1206LED_1PRIMARY]  211.79,151.93 180 top
D201  26-21/GPC-F3138B/CA  [1206LED_1PRIMARY]  97.1,64.93 270 top
D300  STTH1R04U  [SMB_1PRIMARY]  231.14,203.22 0 top
D301  STTH1R04U  [SMB_1PRIMARY]  229.74,151.2 0 top
D302  SS14  [SMA_1PRIMARY]  214.18,81.59 0 top
D303  STTH1R04U  [SMB_1PRIMARY]  174.62,174.77 270 top
D304  STTH1R04U  [SMB_1PRIMARY]  272.67,251.22 90 top
D305  STTH1R04U  [SMB_1PRIMARY]  288.16,153.69 0 top
D306  SS14  [SMA_1PRIMARY]  199.85,79.33 0 top
D307  15A,_600V  [TO247-AD_1PRIMARY]  308.67,114.81 0 top
D308  15A,_600V  [TO247-AD_1PRIMARY]  308.67,93.6 0 top
D309  15A,_600V  [TO247-AD_1PRIMARY]  308.67,72.39 0 top
D310  15A,_600V  [TO247-AD_1PRIMARY]  326.23,72.41 180 top
D311  15A,_600V  [TO247-AD_1PRIMARY]  326.23,93.64 180 top
D312  15A,_600V  [TO247-AD_1PRIMARY]  326.23,114.72 180 top
D313  GB02SLT12-214  [SMB_1PRIMARY]  222.12,188.74 90 top
D314  GB02SLT12-214  [SMB_1PRIMARY]  307.98,251.99 180 top
D315  SD103AW  [SOD323_1PRIMARY]  216.53,224.81 180 top
D316  SS14  [SMA_1PRIMARY]  211.1,212.07 0 top
D317  SD103AW  [SOD323_1PRIMARY]  215.6,158.28 0 top
D318  SS14  [SMA_1PRIMARY]  288.36,235.34 180 top
D319  SD103AW  [SOD323_1PRIMARY]  280.3,219.73 0 top
D320  SD103AW  [SOD323_1PRIMARY]  284.73,167.41 180 top
D321  SD103AW  [SOD323_1PRIMARY]  215.67,197.1 180 top
D322  SD103AW  [SOD323_1PRIMARY]  287.19,249.44 0 top
D323  STTH1R04U  [SMB_1PRIMARY]  235.13,91.56 180 top
D324  BAT54S  [SOT23DUALDIODE_1PRIMARY]  165.74,80.28 90 top
DUMMY1  [P:EX157Y157D1571]  386.16,213.09 0 top
DUMMY2  [P:EX157Y157D1571]  276.17,72.76 0 top
DUMMY3  [P:EX157Y157D1571]  276.17,127.29 0 top
DUMMY4  [P:EX157Y157D1571]  360.38,121.4 0 top
DUMMY5  [P:EX157Y157D1571]  426.34,121.4 0 top
DUMMY6  [P:EX157Y157D1571]  83.01,260.99 0 top
DUMMY7  [P:EX157Y157D1571]  426.34,66.86 0 top
DUMMY8  [P:EX157Y157D1571]  353.36,238.49 0 top
DUMMY9  [P:EX157Y157D1571]  360.38,66.86 0 top
DUMMY10  [P:EX157Y157D1571]  419.23,238.49 0 top
DUMMY11  [P:EX157Y157D1571]  167.97,130.41 0 top
DUMMY12  [P:EX157Y157D1571]  83.01,98.28 0 top
DUMMY13  [P:EX157Y157D1571]  83.01,53.2 0 top
IC100  PC817  [DIP04_1PRIMARY]  113.03,156.64 180 top
IC300  LMV641  [SOT23-5_1PRIMARY]  216.46,85.4 0 top
IC301  LMV641  [SOT23-5_1PRIMARY]  214.33,68.92 180 top
IC302  LMV641  [SOT23-5_1PRIMARY]  208.49,72.22 180 top
IC303  UCC28951  [TSSOP24_1PRIMARY]  155.18,92.48 0 top
IC306  UCC21710  [SOIC16_WIDE_HV_1PRIMARY]  207.09,229.32 180 top
IC307  UCC21710  [SOIC16_WIDE_HV_1PRIMARY]  206.35,162.77 180 top
IC308  MAX764  [SOIC8_1PRIMARY]  216.18,206.36 0 top
IC309  MAX764  [SOIC8_1PRIMARY]  282.01,240.42 180 top
IC310  UCC21710  [SOIC16_WIDE_HV_1PRIMARY]  289.73,216.62 0 top
IC311  UCC21710  [SOIC16_WIDE_HV_1PRIMARY]  274.15,170.33 180 top
IC312  LM317  [SOT223_TI_1PRIMARY]  210.97,196.59 90 top
IC313  LM317  [SOT223_TI_1PRIMARY]  291.97,248.18 270 top
IC400  R7FA6M5  [QFP-144-M_1PRIMARY]  179.38,54.18 45 top
IC401  8MHz  [RESONATOR_CSTNE8M00G520000R0_1PRIMARY]  163.65,43.9 90 top
IC500  RS-485_TxRx  [SOIC8_1PRIMARY]  152.05,51.58 180 top
K100  ALFG2PF09  [ALFG2PF09_1PRIMARY]  60.26,166.79 270 top
K101  ALFG2PF09  [ALFG2PF09_1PRIMARY]  93.64,166.8 270 top
L300  600R@100MHz  [FERRITE_SMD_0603_1PRIMARY]  158.8,99.33 90 top
L302  600R@100MHz  [FERRITE_SMD_0603_1PRIMARY]  198.84,221.7 90 top
L303  47µH  [SRN8040TA_1PRIMARY]  218.4,214.18 270 top
L304  600R@100MHz  [FERRITE_SMD_0603_1PRIMARY]  198.49,155.42 90 top
L305  1uH  [SRP1770TA_1PRIMARY]  338.96,180.87 90 top
L307  47µH  [SRN8040TA_1PRIMARY]  281.05,232.73 90 top
L308  600R@100MHz  [FERRITE_SMD_0603_1PRIMARY]  296.85,223.86 270 top
L309  600R@100MHz  [FERRITE_SMD_0603_1PRIMARY]  266.57,162.32 90 top
Q100  BC640TA  [TO-92_1PRIMARY]  103.89,156.39 180 top
Q101  KSD1616AYTA  [TO-92_1PRIMARY]  97.79,150.04 0 top
Q300  2N7002  [SOT23-3N_1PRIMARY]  139.09,83.89 90 top
Q500  DMP6185SEQ-13  [SOT223_1PRIMARY]  207.37,43.2 0 top
Q501  BC817-25  [SOT23-3N_2PRIMARY]  227.37,60.45 0 top
Q502  DMP6185SEQ-13  [SOT223_1PRIMARY]  216.01,43.2 0 top
Q503  BC817-25  [SOT23-3N_2PRIMARY]  227.37,56.9 0 top
Q504  DMP6185SEQ-13  [SOT223_1PRIMARY]  224.64,43.2 0 top
Q505  BC817-25  [SOT23-3N_2PRIMARY]  227.37,53.34 0 top
Q506  BC817-40  [SOT23-3N_2PRIMARY]  158.57,45.19 0 top
Q507  BC817-25  [SOT23-3N_2PRIMARY]  227.37,49.79 0 top
R100  120R,3.5A  [NTC_D10_P7.5_1PRIMARY]  43.61,154.43 270 top
R101  220K_5%  [EIA1206_1PRIMARY]  51.94,88.09 0 top
R102  100K_5%  [RES-RM20-RSF2W_1PRIMARY]  125.16,234.88 90 top
R103  220K_5%  [EIA1206_1PRIMARY]  46.23,88.09 0 top
R104  100K_5%  [RES-RM20-RSF2W_1PRIMARY]  125.16,201.86 90 top
R105  82K_1%  [2010RESISTOR_1PRIMARY]  133.99,160.04 90 top
R106  0R_1%  [EIA0603_2PRIMARY]  107.19,153.6 180 top
R107  330R_1%  [EIA0603_2PRIMARY]  120.65,156.64 90 top
R108  18R_1%  [2010RESISTOR_1PRIMARY]  95.55,135.88 90 top
R109  330R_1%  [EIA0603_2PRIMARY]  107.19,159.95 180 top
R110  220K_1%  [EIA0603_2PRIMARY]  119.13,156.64 270 top
R111  1K_1%  [EIA1206_1PRIMARY]  102.54,135.88 270 top
R112  120R,3.5A  [NTC_D10_P7.5_1PRIMARY]  37.9,154.43 270 top
R113  18R_1%  [2010RESISTOR_1PRIMARY]  99.36,135.88 90 top
R114  10_Meg  [RES-RM12.5-VR37_1PRIMARY]  48.9,36.21 180 top
R115  10_Meg  [RES-RM12.5-VR37_1PRIMARY]  76.07,36.09 180 top
R200  1K_1%  [EIA0603_2PRIMARY]  213.72,154.7 270 top
R201  1k_1%  [EIA0603_2PRIMARY]  99.44,65.3 90 top
R300  100K_1%  [EIA0603_2PRIMARY]  219,84.13 270 top
R301  47R  [2512RESISTOR_1PRIMARY]  233.04,210.2 0 top
R302  47R  [2512RESISTOR_1PRIMARY]  263.52,240.81 90 top
R303  4.7K_1%  [EIA0603_2PRIMARY]  198.84,224.88 90 top
R304  33R_1%  [2010RESISTOR_1PRIMARY]  227.2,174.77 90 top
R305  10K_1%  [EIA0603_2PRIMARY]  213.67,79.31 180 top
R306  10K_1%  [EIA0603_2PRIMARY]  219,87.44 270 top
R307  10K_1%  [EIA0603_2PRIMARY]  221.62,89.93 0 top
R308  4.7K_1%  [EIA0603_2PRIMARY]  196.93,224.88 90 top
R309  1K_1%  [2010RESISTOR_1PRIMARY]  230.5,229.25 270 top
R310  47R  [2512RESISTOR_1PRIMARY]  233.04,217.19 180 top
R311  47R  [2512RESISTOR_1PRIMARY]  267.84,234.97 90 top
R312  1K_1%  [2010RESISTOR_1PRIMARY]  267.84,226.59 270 top
R313  33R_1%  [2010RESISTOR_1PRIMARY]  222.38,174.77 90 top
R314  10K_1%  [EIA0603_2PRIMARY]  221.54,88.2 0 top
R315  1K_1%  [EIA0603_2PRIMARY]  163.88,83.69 90 top
R316  12R_1%  [2512RESISTOR_1PRIMARY]  174.62,166.9 90 top
R317  10K_1%  [EIA0603_2PRIMARY]  212.65,89.72 270 top
R318  10K_1%  [EIA0603_2PRIMARY]  209.6,89.72 90 top
R319  10K_1%  [EIA0603_2PRIMARY]  208.08,89.72 90 top
R320  10K_1%  [EIA0603_2PRIMARY]  209.6,81.59 180 top
R321  10K_1%  [EIA0603_2PRIMARY]  215.7,89.72 90 top
R322  47R  [2512RESISTOR_1PRIMARY]  232.54,159.53 0 top
R323  47R  [2512RESISTOR_1PRIMARY]  303.66,157.5 270 top
R324  10K_1%  [EIA0603_2PRIMARY]  209.6,83.12 0 top
R325  33R_1%  [2010RESISTOR_1PRIMARY]  228.02,234.24 0 top
R326  10_Meg  [RES-RM12.5-VR37_1PRIMARY]  245.49,194.33 180 top
R327  22R_1%  [2010RESISTOR_1PRIMARY]  228.02,238.05 0 top
R328  1K_1%  [2010RESISTOR_1PRIMARY]  232.03,174.52 270 top
R329  47R  [2512RESISTOR_1PRIMARY]  232.54,165.37 180 top
R330  47R  [2512RESISTOR_1PRIMARY]  299.59,163.34 270 top
R331  1K_1%  [2010RESISTOR_1PRIMARY]  295.27,172.74 90 top
R332  33R_1%  [2010RESISTOR_1PRIMARY]  267.84,219.73 90 top
R333  150K_1%  [EIA0603_2PRIMARY]  205.95,71.97 90 top
R334  100K_1%  [EIA0603_2PRIMARY]  216.36,73.74 180 top
R335  1.5k_1%  [EIA0603_2PRIMARY]  221.19,72.22 0 top
R336  10K_1%  [EIA0603_2PRIMARY]  198.84,77.05 180 top
R337  510R_1%  [EIA0603_2PRIMARY]  216.36,72.22 0 top
R338  33K_1%  [EIA0603_2PRIMARY]  207.73,66.63 90 top
R339  162R_1%  [EIA0603_2PRIMARY]  211.54,65.87 0 top
R340  300uR_1%  [WSLP3921L_1PRIMARY]  383.86,49.8 180 top
R341  510R_1%  [EIA0603_2PRIMARY]  218.14,65.87 0 top
R342  220K_1%  [EIA0603_2PRIMARY]  209.25,66.63 90 top
R343  10K_1%  [EIA0603_2PRIMARY]  210.77,68.16 270 top
R344  1.5k_1%  [EIA0603_2PRIMARY]  221.19,67.65 0 top
R345  100K_1%  [EIA0603_2PRIMARY]  214.71,65.87 180 top
R346  3.3K_1%  [EIA0603_2PRIMARY]  203.15,66.63 90 top
R347  3.3K_1%  [EIA0603_2PRIMARY]  200.11,66.63 270 top
R348  3.3K_1%  [EIA0603_2PRIMARY]  202.9,71.97 90 top
R349  10K_1%  [EIA0603_2PRIMARY]  200.11,74.76 180 top
R350  10K_1%  [EIA0603_2PRIMARY]  206.2,66.63 270 top
R351  10K_1%  [EIA0603_2PRIMARY]  200.11,73.24 0 top
R352  18K_1%  [EIA0603_2PRIMARY]  144.15,100.35 180 top
R353  330R_1%  [EIA0603_2PRIMARY]  179.62,112.79 90 top
R354  0R_1%  [EIA0603_2PRIMARY]  144.32,97.55 0 top
R355  10K_1%  [EIA0603_2PRIMARY]  179.62,109.49 270 top
R356  10K_1%  [EIA0603_2PRIMARY]  177.08,114.31 180 top
R357  49.9K_1%  [EIA0603_2PRIMARY]  144.32,94.5 0 top
R358  10R_1%  [EIA0603_2PRIMARY]  177.08,108.72 0 top
R359  49.9K_1%  [EIA0603_2PRIMARY]  144.32,92.98 0 top
R360  100K_1%  [EIA0603_2PRIMARY]  144.32,91.45 0 top
R361  330R_1%  [EIA0603_2PRIMARY]  179.62,105.17 90 top
R362  65K_1%  [EIA0603_2PRIMARY]  144.32,89.93 0 top
R363  10K_1%  [EIA0603_2PRIMARY]  158.29,83.69 90 top
R364  10K_1%  [EIA0603_2PRIMARY]  179.62,101.61 270 top
R365  100K_1%  [EIA0603_2PRIMARY]  144.32,88.4 180 top
R366  10K_1%  [EIA0603_2PRIMARY]  156.51,83.69 90 top
R367  10K_1%  [EIA0603_2PRIMARY]  177.08,105.93 180 top
R368  100K_1%  [EIA0603_2PRIMARY]  144.32,86.88 180 top
R369  150K_1%  [EIA0603_2PRIMARY]  149.1,83.69 90 top
R370  10R_1%  [EIA0603_2PRIMARY]  177.08,100.34 0 top
R371  150K_1%  [EIA0603_2PRIMARY]  147.45,83.69 90 top
R372  10R  [2512RESISTOR_1PRIMARY]  215.77,180.61 180 top
R373  330R_1%  [EIA0603_2PRIMARY]  179.62,96.53 90 top
R374  18K_1%  [EIA0603_2PRIMARY]  150.92,83.69 270 top
R375  470R_1%  [EIA0603_2PRIMARY]  154.73,83.69 90 top
R376  470R_1%  [EIA0603_2PRIMARY]  160.32,83.69 90 top
R377  10K_1%  [EIA0603_2PRIMARY]  179.62,93.23 270 top
R378  10K_1%  [EIA0603_2PRIMARY]  177.08,97.29 180 top
R379  0R_1%  [EIA0603_2PRIMARY]  152.95,83.69 270 top
R380  10R_1%  [EIA0603_2PRIMARY]  177.08,91.71 0 top
R381  330R_1%  [EIA0603_2PRIMARY]  179.62,87.9 90 top
R382  10K_1%  [EIA0603_2PRIMARY]  179.62,84.59 270 top
R383  10K_1%  [EIA0603_2PRIMARY]  177.08,88.66 180 top
R384  10R_1%  [EIA0603_2PRIMARY]  177.08,83.07 0 top
R385  22R_1%  [2010RESISTOR_1PRIMARY]  264.29,219.73 90 top
R386  10K_1%  [EIA0603_1PRIMARY]  165.74,83.69 90 top
R387  33R_1%  [2010RESISTOR_1PRIMARY]  291.64,176.12 90 top
R388  10K_1%  [EIA0603_1PRIMARY]  134.72,83.69 90 top
R389  825K_1%  [EIA0603_1PRIMARY]  141.58,83.69 90 top
R390  4.7K_1%  [EIA0603_2PRIMARY]  195.03,224.88 90 top
R391  3.3K_1%  [EIA0603_1PRIMARY]  136.28,83.69 270 top
R396  33R_1%  [2010RESISTOR_1PRIMARY]  288.08,176.12 90 top
R397  5.6K_1%  [EIA0603_2PRIMARY]  222.25,224.81 270 top
R398  10_Meg  [RES-RM12.5-VR37_1PRIMARY]  239.65,190.01 0 top
R399  33k_1%  [EIA1206_1PRIMARY]  209.83,208.9 180 top
R400  10k_1%  [EIA1206_1PRIMARY]  209.83,204.45 180 top
R401  10R  [2512RESISTOR_1PRIMARY]  316.6,247.69 0 top
R402  33k_1%  [EIA1206_1PRIMARY]  288.82,238.45 0 top
R403  10k_1%  [EIA1206_1PRIMARY]  288.82,242.51 0 top
R404  220R_1%  [EIA0603_2PRIMARY]  226.06,224.81 270 top
R405  2.2K_1%  [EIA0603_2PRIMARY]  218.44,224.81 90 top
R406  5.6K_1%  [EIA0603_2PRIMARY]  221.95,158.28 270 top
R407  4.7K_1%  [EIA0603_2PRIMARY]  198.49,158.6 90 top
R408  4.7K_1%  [EIA0603_2PRIMARY]  196.58,158.6 90 top
R409  4.7K_1%  [EIA0603_2PRIMARY]  194.68,158.6 90 top
R410  220R_1%  [EIA0603_2PRIMARY]  223.22,163.99 0 top
R411  2.2K_1%  [EIA0603_2PRIMARY]  217.51,158.28 270 top
R412  5.6K_1%  [EIA0603_2PRIMARY]  276.49,219.73 270 top
R413  4.7K_1%  [EIA0603_2PRIMARY]  296.85,220.68 270 top
R414  4.7K_1%  [EIA0603_2PRIMARY]  298.75,220.68 270 top
R415  4.7K_1%  [EIA0603_2PRIMARY]  300.66,220.68 270 top
R416  220R_1%  [EIA0603_2PRIMARY]  272.68,219.73 90 top
R417  2.2K_1%  [EIA0603_2PRIMARY]  278.4,219.73 270 top
R418  1K_1%  [EIA0603_2PRIMARY]  285.36,162.33 180 top
R419  4.7K_1%  [EIA0603_2PRIMARY]  266.63,166.13 90 top
R420  4.7K_1%  [EIA0603_2PRIMARY]  263.78,166.13 90 top
R421  4.7K_1%  [EIA0603_2PRIMARY]  261.75,166.13 90 top
R422  220R_1%  [EIA0603_2PRIMARY]  286,159.79 270 top
R423  2.2K_1%  [EIA0603_2PRIMARY]  282.82,167.41 90 top
R424  10R  [2512RESISTOR_1PRIMARY]  215.77,184.68 180 top
R425  5.6K_1%  [EIA0603_2PRIMARY]  220.34,224.81 90 top
R426  5.6K_1%  [EIA0603_2PRIMARY]  219.41,158.28 270 top
R427  10R  [2512RESISTOR_1PRIMARY]  316.6,251.76 0 top
R428  5.6K_1%  [EIA0603_2PRIMARY]  274.59,219.73 90 top
R429  10K_1%  [EIA0603_2PRIMARY]  285.37,164.1 0 top
R430  1K  [EIA0603_2PRIMARY]  209.7,191.51 0 top
R431  1K  [EIA0603_2PRIMARY]  293.24,253 180 top
R432  8.66K  [EIA0603_2PRIMARY]  206.53,191.51 0 top
R433  8.66K  [EIA0603_2PRIMARY]  296.29,253 180 top
R434  15.8K_1%  [EIA0603_2PRIMARY]  223.9,90.7 270 top
R435  15.8K_1%  [EIA0603_2PRIMARY]  227.26,87.24 270 top
R436  41K_1%  [2010RESISTOR_1PRIMARY]  229.8,89.02 90 top
R437  100K_1%  [EIA0603_2PRIMARY]  225.48,87.24 90 top
R438  1.2K_1%  [2010RESISTOR_1PRIMARY]  234.88,87.49 180 top
R439  22R,_5%_2W  [RES-RM15-RSF1W_1PRIMARY]  290.96,81.16 270 top
R440  22R,_5%_2W  [RES-RM15-RSF1W_1PRIMARY]  290.96,101.62 270 top
R441  22R,_5%_2W  [RES-RM15-RSF1W_1PRIMARY]  345.98,63.31 270 top
R442  22R,_5%_2W  [RES-RM15-RSF1W_1PRIMARY]  334.83,55.9 180 top
R443  10K_1%  [EIA0603_2PRIMARY]  186.57,87.5 270 top
R444  10K_1%  [EIA0603_2PRIMARY]  194.7,87.5 270 top
R445  10K_1%  [EIA0603_2PRIMARY]  183.27,87.5 270 top
R446  10K_1%  [EIA0603_2PRIMARY]  191.4,87.5 270 top
R447  10K_1%  [EIA0603_2PRIMARY]  231.01,78.76 180 top
R448  10K_1%  [EIA0603_2PRIMARY]  231.01,75.2 180 top
R449  10K_1%  [EIA0603_2PRIMARY]  190.91,40.4 270 top
R450  10K_1%  [EIA0603_2PRIMARY]  166.52,43.45 180 top
R451  0R_1%  [EIA0603_2PRIMARY]  166.52,44.98 180 top
R452  100R_1%  [EIA0603_2PRIMARY]  189.61,69.11 0 top
R461  10R_1%  [EIA0603_2PRIMARY]  189.61,72.66 180 top
R462  10R_1%  [EIA0603_2PRIMARY]  182.75,76.22 180 top
R463  10k_1%  [EIA0603_2PRIMARY]  185.04,75.46 270 top
R500  10K_1%  [EIA0603_2PRIMARY]  203.1,43.96 90 top
R501  10K_1%  [EIA0603_2PRIMARY]  203.07,40.66 90 top
R502  100R_1%  [EIA0603_2PRIMARY]  193.96,40.4 90 top
R503  10K_1%  [EIA0603_2PRIMARY]  192.43,40.4 270 top
R504  1K_1%  [EIA0603_2PRIMARY]  223.79,61.41 180 top
R505  10K_1%  [EIA0603_2PRIMARY]  211.69,43.96 90 top
R506  100R_1%  [EIA0603_2PRIMARY]  223.79,59.41 0 top
R507  10K_1%  [EIA0603_2PRIMARY]  211.69,40.66 90 top
R508  100R_1%  [EIA0603_2PRIMARY]  197,40.4 90 top
R509  1K_1%  [EIA0603_2PRIMARY]  223.79,57.81 180 top
R510  10K_1%  [EIA0603_2PRIMARY]  195.48,40.4 270 top
R511  100R_1%  [EIA0603_2PRIMARY]  223.82,55.88 0 top
R512  10K_1%  [EIA0603_2PRIMARY]  220.32,43.96 90 top
R513  1K_1%  [EIA0603_2PRIMARY]  223.82,54.36 180 top
R514  10K_1%  [EIA0603_2PRIMARY]  220.32,40.66 90 top
R515  10k  [EIA0603_2PRIMARY]  158.32,47.98 180 top
R516  10k  [EIA0603_2PRIMARY]  155.78,47.22 90 top
R517  100R_1%  [EIA0603_2PRIMARY]  200.05,40.4 90 top
R518  100R_1%  [EIA0603_2PRIMARY]  223.82,52.33 0 top
R519  10K_1%  [EIA0603_2PRIMARY]  198.53,40.4 270 top
R520  470R  [EIA0603_2PRIMARY]  158.26,52.67 180 top
R521  100R_1%  [EIA0603_2PRIMARY]  140.84,48.28 90 top
R522  470R  [EIA0603_2PRIMARY]  158.26,51.15 180 top
R523  100R_1%  [EIA0603_2PRIMARY]  145.67,48.28 90 top
R524  1K_1%  [EIA0603_2PRIMARY]  223.82,50.8 180 top
R525  470R  [EIA0603_2PRIMARY]  158.3,49.65 180 top
R526  0R_1%  [EIA0603_2PRIMARY]  127.64,48.79 0 top
R527  0R_1%  [EIA0603_2PRIMARY]  127.64,47.26 0 top
R528  100R_1%  [EIA0603_2PRIMARY]  223.82,48.77 0 top
T300  STGW30H60DFB  [TO247-AC_2PRIMARY]  259,227.88 180 top
T301  STGW30H60DFB  [TO247-AC_2PRIMARY]  241,227.88 0 top
T302  2N7002  [SOT23-3N_2PRIMARY]  209.6,85.91 90 top
T303  STGW30H60DFB  [TO247-AC_2PRIMARY]  304.33,172.74 0 top
T304  STGW30H60DFB  [TO247-AC_1PRIMARY]  241,172.74 0 top
T305  PSFB_Tr.  [11-0060-A_1PRIMARY]  395.1,132.83 0 top
T306  2N7002  [SOT23-3N_2PRIMARY]  200.11,70.44 270 top
T307  2N7002  [SOT23-3N_2PRIMARY]  176.83,111.52 270 top
T308  2N7002  [SOT23-3N_2PRIMARY]  176.83,103.14 270 top
T309  2N7002  [SOT23-3N_2PRIMARY]  176.83,94.5 270 top
T310  2N7002  [SOT23-3N_2PRIMARY]  176.83,85.86 270 top
T313  2N7002  [SOT23-3N_2PRIMARY]  187.83,75.2 0 top
T500  Value  [SOT23-3N_2PRIMARY]  193.2,37.1 0 top
T501  Value  [SOT23-3N_2PRIMARY]  197.26,37.1 0 top
T502  Value  [SOT23-3N_2PRIMARY]  201.32,37.1 0 top
TR300  56mH  [CST206-2A_1PRIMARY]  172.09,209.25 90 top
U1  FiducialMarker  [FIDUCIALMARKER_1PRIMARY]  82.93,41.42 0 top
U2  FiducialMarker  [FIDUCIALMARKER_1PRIMARY]  424.81,261.64 0 top
U300  WireHole  [PAD-3.0X6.0MM_7PRIMARY]  165.67,235.79 90 top
U301  WireHole  [PAD-3.0X6.0MM_6PRIMARY]  180.02,235.57 0 top
U303  WireHole  [PAD-3.0X6.0MM_5PRIMARY]  233.37,227.98 270 top
U304  Value  [PAD-3.0X6.0MM_4PRIMARY]  240.45,176.74 270 top
U305  Value  [PAD-3.0X6.0MM_3PRIMARY]  355.49,172.74 180 top
U306  WireHole  [PAD-3.0X6.0MM_2PRIMARY]  317.56,105.68 0 top
U307  WireHole  [PAD-3.0X6.0MM_1PRIMARY]  308.56,105.68 0 top
V100  430V/8.6J  [EPCOS_B72205S0271K101_1PRIMARY]  46.99,52.47 0 top
V300  430V/8.6J  [EPCOS_B72205S0271K101_1PRIMARY]  332.11,44.72 180 top
V400  CG0603MLC-05E  [EIA0603_2PRIMARY]  197.49,87.5 90 top
V401  CG0603MLC-05E  [EIA0603_2PRIMARY]  202.57,87.5 90 top
V402  CG0603MLC-05E  [EIA0603_2PRIMARY]  200.03,87.5 90 top
V500  0603ESDA-24N  [EIA0603_2PRIMARY]  207.42,38.12 0 top
V501  0603ESDA-24N  [EIA0603_2PRIMARY]  216.05,38.12 0 top
V502  0603ESDA-24N  [EIA0603_2PRIMARY]  224.69,38.12 180 top
V503  0603ESDA-24N  [EIA0603_2PRIMARY]  144.15,48.28 270 top
V504  0603ESDA-24N  [EIA0603_2PRIMARY]  142.37,48.28 270 top
X1  6.3_X_0.8mm  [X01_FASTONPCBTAB6.3MM1.8MMHO87PRIMARY]  57.27,45.23 180 top
X2  M10_Screw_Terminal  [X01_M10_7461061_1PRIMARY]  284.43,49.83 0 top
X3  6.3_X_0.8mm  [X01_FASTONPCBTAB6.3MM1.8MMHO87PRIMARY]  40.25,45.16 180 top
X4  M10_Screw_Terminal  [X01_M10_7461061_1PRIMARY]  359.47,49.83 0 top
X5  RJ45  [X08_615008148521_1PRIMARY]  139.76,39.88 0 top
X6  RJ45  [X08_615008148521_1PRIMARY]  121.84,39.88 0 top
X7  X04_100mil  [X04_100MIL_1PRIMARY]  235.57,47.13 270 top
X8  X04_100mil  [X04_100MIL_1PRIMARY]  235.57,59.32 270 top
X100  Fuse_Clip  [FUSE_CLIP_01020071Z_1PRIMARY]  71.06,46.9 270 top
X101  Fuse_Clip  [FUSE_CLIP_01020071Z_1PRIMARY]  71.06,76.02 90 top
X200  Value  [X01_FASTONPCBTAB6.3MM1.8MMHO87PRIMARY]  57.27,84.2 180 top
X201  Value  [X01_FASTONPCBTAB6.3MM1.8MMHO87PRIMARY]  57.27,73.47 180 top
X202  Value  [X01_FASTONPCBTAB6.3MM1.8MMHO87PRIMARY]  40.25,73.47 180 top
X203  Value  [X01_FASTONPCBTAB6.3MM1.8MMHO87PRIMARY]  40.25,84.2 180 top
X204  X06_Molex_Microfit  [X06_MOLEX_MICROFIT_1PRIMARY]  107.31,38.12 180 top
X205  X06_Molex_Microfit  [X06_MOLEX_MICROFIT_1PRIMARY]  226.24,132.61 180 top
X400  X04_100mil  [X04_100MIL_1PRIMARY]  235.57,80.15 270 top
X401  X04_100mil  [X04_100MIL_1PRIMARY]  205.11,92.07 180 top
X402  X04_100mil  [X04_100MIL_1PRIMARY]  185.55,92.07 0 top
X403  Package  [X10_100MIL_2XROW_VERT_1PRIMARY]  206.15,54.12 0 top

## Library data of the parts
C100-C106 C108 C200-C207 C210 C211 C300-C320 C323-C325 C328-C340 C342-C405 C407-C458 C500-C506 D100-D105 D200 D201 D300-D324 DUMMY1-DUMMY13 IC100 IC300-IC303 IC306-IC313 IC400 IC401 IC500 K100 K101 L300 L302-L305 L307-L309 Q100 Q101 Q300 Q500-Q507 R100-R115 R200 R201 R300-R391 R396-R452 R461-R463 R500-R528 T300-T310 T313 T500-T502 TR300 U1 U2 U300 U301 U303-U307 V100 V300 V400-V402 V500-V504 X1-X8 X100 X101 X200-X205 X400-X403 = Welder_PSU

## Nets
_COMM_RX_EN: IC400.32 R520.1
AI_I_OUT: C433.2 IC301.1 IC400.113 R339.2 R345.2
COMM_TX_EN: IC400.33 R522.1
CTRLR_OUTA: IC303.22 R358.1
CTRLR_OUTB: IC303.21 R370.1
CTRLR_OUTC: IC303.20 R380.1
CTRLR_OUTD: IC303.19 R384.1
CTRLR_OUTE: IC303.18
CTRLR_OUTF: IC303.17
DI_UART_RX: IC400.35 Q506.3 R515.1
DO_7SEG_BCD_A: IC400.71 R504.2
DO_7SEG_BCD_B: IC400.70 R509.2
DO_7SEG_BCD_C: IC400.69 R513.2
DO_7SEG_BCD_D: IC400.66 R524.2
DO_7SEG_DISP1_EN: IC400.65 R517.2
DO_7SEG_DISP2_EN: IC400.64 R508.2
DO_7SEG_DISP3_EN: IC400.63 R502.2
DO_ABRUPT_I_OFF: IC400.118 R462.2
DO_PSFB_CTRL_ON: IC400.98
DO_UART_TX: IC400.34 R525.1
EA_IN: D302.1 D306.1 IC303.2 R305.2 R336.2 R352.2 R461.1
G_DRV1_VCC: C332.2 C333.2 R303.1 R308.1 R390.1
G_DRV2_VCC: C343.2 C344.2 R407.1 R408.1 R409.1
G_DRV3_VCC: C360.2 C361.2 R413.1 R414.1 R415.1
G_DRV4_VCC: C363.2 C364.2 R419.1 R420.1 R421.1
G_DRV_INA: R353.1 R355.1
G_DRV_INB: R361.1 R364.1
G_DRV_INC: R373.1 R377.1
G_DRV_IND: R381.1 R382.1
GND_AUX: R398.1
NDO_PSFB_CTRL_ON: R452.1
NETC301_1: C301.1 C305.2 IC300.4 R300.1 R306.2
NETC301_2: C301.2 C302.2 D302.2 IC300.1 R305.1
NETC302_1: C302.1 R300.2
NETC305_1: C305.1 R314.2
NETC309_2: C309.2 IC300.3 R317.2 R321.1
NETC310_2: C310.2 R317.1 R318.2
NETC311_1: C311.1 C315.1 IC302.4 R333.1 R338.2
NETC311_2: C311.2 C312.2 D306.2 IC302.1 R336.1
NETC312_1: C312.1 R333.2
NETC313_1: C313.1 C314.2 C316.2
NETC313_2: C313.2 R335.1 R337.2
NETC315_2: C315.2 R342.2
NETC316_1: C316.1 R341.2 R344.1
NETC317_2: C317.2 IC302.3 R346.2 R350.1
NETC318_2: C318.2 R346.1 R347.2
NETC320_2: C320.2 C422.2
NETC354_2: C354.2 IC308.4 R400.1
NETC359_2: C359.2 IC309.4 R403.1
NETC383_1: C383.1 IC301.3 R334.2 R337.1
NETC387_2: C387.2
NETC415_1: C415.1 C418.2
NETC416_2: C416.2 R307.2 R434.1
NETC417_2: C417.2 R434.2 R435.1 R437.2
NETC421_2: C421.2 R338.1 R339.1 R342.1 R343.2
NETC423_1: C423.1 R397.1 R404.1 R425.2
NETC424_2: C424.2 R406.1 R410.1 R426.2
NETC425_2: C425.2 R412.2 R416.1 R428.1
NETC426_2: C426.2 R418.1 R422.1 R429.2
NETC433_1: C433.1 IC301.4 R341.1 R345.1
NETC451_1: C451.1 IC400.15
NETC452_1: C452.1 IC400.92
NETC505_2: C505.2 R521.2 R523.2
NETD100_K: D100.2 D102.2
NETD101_1: D101.1 K100.4 K101.4 R100.2 R112.2
NETD102_A: D102.1
NETD103_A: D103.1 K100.1 K101.1 Q100.1 R106.2
NETD103_K: D103.2 K100.2 K101.2 Q101.1
NETD104_K: D104.2 R107.2
NETD105_K: D105.2 Q101.3 R111.1
NETD200_1: D200.1 R200.2
NETD201_1: D201.1 R201.2
NETD300_A: D300.1 R404.2
NETD301_A: D301.1 R410.2
NETD303_A: D303.1 TR300.2
NETD303_K: R315.2
NETD304_A: D304.1 R416.2
NETD305_A: D305.1 R422.2
NETD307_1: D307.1 D307.3 D308.1 D308.3 D309.1 D309.3 R440.1 T305.5
NETD310_1: D310.1 D310.3 D311.1 D311.3 D312.1 D312.3 R441.1 T305.3
NETD316_2: D316.2 IC308.8 L303.2
NETD318_2: D318.2 IC309.8 L307.2
NETIC100_1: IC100.1 R107.1 R110.2
NETIC100_4: IC100.4 R106.1 R109.1
NETIC303_3: IC303.3 R354.1
NETIC303_4: IC303.4 R354.2
NETIC303_6: IC303.6 R357.2
NETIC303_7: IC303.7 R359.2
NETIC303_8: IC303.8 R360.2
NETIC303_9: IC303.9 R362.2
NETIC303_10: IC303.10 R365.1 R368.1
NETIC303_11: IC303.11 R369.2 R371.2
NETIC303_12: IC303.12 R374.1 R379.1
NETIC303_13: IC303.13 R366.2 R375.2
NETIC303_14: IC303.14 R363.2 R376.2
NETIC303_16: IC303.16 R386.2
NETIC308_2: IC308.2 R399.2 R400.2
NETIC309_2: IC309.2 R402.2 R403.2
NETIC312_1: IC312.1 R430.1 R432.2
NETIC313_1: IC313.1 R431.1 R433.2
NETIC400_19: IC400.19 R450.1 R451.1
NETIC400_20: IC400.20 R450.2
NETIC401_3: R451.2
NETIC500_1: IC500.1 Q506.2
NETIC500_2: IC500.2 R520.2
NETIC500_3: IC500.3 R522.2
NETIC500_4: IC500.4 R525.2
NETQ100_3: Q100.3 R109.2
NETQ101_2: Q101.2
NETQ500_1: Q500.1 R500.1 R501.2
NETQ501_1: Q501.1 R504.1
NETQ501_2: Q501.2 R506.2
NETQ502_1: Q502.1 R505.1 R507.2
NETQ503_1: Q503.1 R509.1
NETQ503_2: Q503.2 R511.2
NETQ504_1: Q504.1 R512.1 R514.2
NETQ505_1: Q505.1 R513.1
NETQ505_2: Q505.2 R518.2
NETQ506_1: Q506.1 R516.1
NETQ507_1: Q507.1 R524.1
NETQ507_2: Q507.2 R528.2
NETR101_1: R101.1 R103.2
NETR114_1: R114.1 R115.2
NETR306_1: R306.1 R307.1 R314.1
NETR318_1: R318.1 R319.1 T302.3
NETR320_1: R320.1 R324.2 T302.1
NETR347_1: R347.1 R348.1 T306.3
NETR349_1: R349.1 R351.2 T306.1
NETR353_2: R353.2 R356.2 T307.2
NETR356_1: R356.1 R358.2 T307.1
NETR361_2: R361.2 R367.2 T308.2
NETR367_1: R367.1 R370.2 T308.1
NETR373_2: R373.2 R378.2 T309.2
NETR378_1: R378.1 R380.2 T309.1
NETR381_2: R381.2 R383.2 T310.2
NETR383_1: R383.1 R384.2 T310.1
NETR435_2: R435.2
NETR439_1: R439.1 R440.2
NETR441_2: R441.2 R442.1
NETR461_2: R461.2 T313.3
NETR462_1: R462.1 R463.1 T313.1
NETR501_1: R501.1 T500.3
NETR502_1: R502.1 R503.2 T500.1
NETR507_1: R507.1 T501.3
NETR508_1: R508.1 R510.2 T501.1
NETR514_1: R514.1 T502.3
NETR517_1: R517.1 R519.2 T502.1
NODE_A: R398.2
QA_GATE: C300.2 T301.1
QA_OC: C342.2 D315.2 R405.1 R425.1
QB_GATE: C353.2 T304.1
QB_OC: C345.2 D317.2 R411.1 R426.1
QC_GATE: C351.1 T300.1
QC_OC: C362.2 D319.2 R412.1 R417.1
QD_GATE: C352.1 T303.1
QD_OC: C365.2 D320.2 R423.1 R429.1
RS485-A: IC500.6 R523.1 R527.2 V503.2 X5.1
RS485-A-NEXT: R527.1 X6.1
RS485-B: IC500.7 R521.1 R526.2 V504.2 X5.2
RS485-B-NEXT: R526.1 X6.2
SS-EN: C324.1 IC303.5 Q300.3 R389.2
V_CS_F: C306.2 R315.1 R363.1 R366.1
V_RECT_F_PLUS: K101.3 R112.1
VDD_A: C330.2 C331.2 C358.2 C411.2 C427.2 D313.2 D321.2 IC312.4
VDD_C: C357.2 C386.2 C412.2 C428.2 C429.2 D314.2 D322.2 IC313.4
VDDA_REG: C388.1 C389.1 C409.2 C413.2 C430.2 C431.2 C432.2 D321.1 IC308.6 IC308.7 IC312.2 IC312.3 R397.2 R430.2
VDDC_REG: C384.1 C385.2 C395.1 C410.2 C414.2 C434.2 C435.2 C436.2 D322.1 IC309.6 IC309.7 IC313.2 IC313.3 R428.2 R431.2
VEE_A: C339.2 C340.2 C390.1 C391.1 D316.1 IC308.1 R399.1
VEE_C: C355.2 C356.2 C396.1 C397.1 C398.2 C399.2 D318.1 IC309.1 R402.1
VREF: C319.1 IC303.1 R352.1 R368.2 R369.1 R374.2
WELDER+: V300.2
WELDER-: R335.2 R340.2 V300.1 X4.1 X4.2 X4.3 X4.4 X4.5 X4.6 X4.7 X4.8 X4.9 X4.10 X4.11 X4.12 X4.13 X4.14 X4.15 X4.16 X4.17 X4.18 X4.19 X4.20 X4.21 X4.22 X4.23 X4.24 X4.25 X4.26 X4.27 X4.28 X4.29 X4.30 X4.31 X4.32 X4.33 X4.34 X4.35 X4.36

## Tracks (layer width: path | path; a pad name or v marks a point on that pad's centre or on a via)
_COMM_RX_EN  (2 unrouted)
  Top 0.203: R520.1 159.2,52.58 160.7,52.58 162,51.28 162,40.48 162.6,39.88 174.62,39.88 IC400.32
_G_DRV_FAULTA  (via drill 0.3 pad 0.6)  (1 unrouted)
  Top 0.203: 187.5,61.23 192.18,65.92 192.18,79.15 185.75,85.58 185.75,87.34 184.79,88.3 | 184.79,88.3 184.74,88.35 183.27,88.35 | 185.56,92.07 185.56,89.06 184.79,88.3
  Top 0.508: 202.24,228.69 197.41,228.69 196.93,229.17 v196.93,230.43 | v196.93,225.73 196.93,225.77
  Route2 0.508: 185.56,92.07 185.56,108.5 195.68,118.63 195.68,180.68 191.72,184.64 191.72,213.57 192.86,214.72 196.93,218.79 v196.93,225.73 v196.93,230.43
_G_DRV_FAULTB  (via drill 0.3 pad 0.6)
  Top 0.203: 187.85,60.88 192.71,65.74 192.71,79.51 189,83.22 189,87.39 188.09,88.3 | v196.54,113.39 196.54,110.86 194.26,108.57 194.26,98.23 188.09,92.07 188.09,88.3 | 186.57,88.35 186.62,88.3 188.09,88.3
  Top 0.508: v196.58,164.02 198.47,162.14 201.5,162.14 | v196.58,159.45 v196.58,159.44 v196.57,159.44
  Route2 0.508: v196.54,113.39 196.58,113.43 v196.58,159.44 v196.58,159.45 v196.58,164.02
_G_DRV_FAULTC  (via drill 0.3 pad 0.6)
  Top 0.203: 188.21,60.53 193.12,65.44 193.12,83.55 192.35,84.31 192.35,87.44 191.45,88.35 191.35,88.35 | v195.53,107.81 194.77,107.05 194.77,96.38 190.63,92.25 190.63,89.11 191,88.75 191,88.7 191.35,88.35 | 191.35,88.35 189.92,88.35 189.87,88.3
  Top 0.508: 298.75,216.48 298.75,216.49 297.99,217.25 294.59,217.25 | 298.75,216.48 v299.32,217.05 | 298.75,215.13 298.75,216.48 | v298.75,219.83 298.75,219.92
  Route2 0.508: v195.53,107.81 255.73,107.81 266.39,118.47 266.39,182.74 272.75,189.09 297.51,189.09 299.32,190.9 v299.32,217.05 299.32,219.24 298.75,219.81 v298.75,219.83
_G_DRV_FAULTD  (via drill 0.3 pad 0.6)  (6 unrouted)
  Top 0.203: 188.56,60.17 193.63,65.25 193.63,79.91 195.6,81.88 195.6,87.5 194.75,88.35 194.7,88.35 | 194.7,88.35 194.65,88.3 193.18,88.3 | 194.7,88.35 194.7,90.55 193.18,92.07 195.28,94.17 195.28,106.7 196.54,107.97 v196.54,109.73
  Top 0.508: 264.01,171.62 263.78,171.39 263.78,170.54 264.63,169.69 269.3,169.69 | v263.78,166.96 263.78,166.98
  Route2 0.508: v196.54,109.73 254.22,109.73 263.78,119.29 263.78,159.09 263.78,163.81 v263.78,166.96 v263.78,171.68
AI_I_OUT  (via drill 0.3 pad 0.6)  (3 unrouted)
  Top 0.203: v213.6,62.38 213.63,62.41 213.63,62.98 213.95,63.3 213.95,65.78 R345.2 | v178.1,65.18 177.93,65.18 IC400.113
  Top 0.508: v214.96,69.05 214.96,69.07 215.24,69.34 215.24,70.17 IC301.1 215.28,70.02 215.33,69.97 | v212.17,67.27 212.31,67.13 212.31,65.95 R339.2 R345.2
  Bottom 0.203: v213.6,62.38 200.52,62.38 199.12,60.98 185.8,60.98 181.6,65.18 v178.1,65.18
  Bottom 0.508: v212.17,67.27 213.2,68.29 214.21,68.29 v214.96,69.05
AN_OUTA_H
  Top 0.635: 211.95,228.69 218.31,228.69
  Top 1.27: 218.31,228.69 220.71,228.69 225.57,233.54 225.57,234.24
AN_OUTA_L
  Top 0.635: 217.88,231.23 211.95,231.23
  Top 1.27: 217.88,231.23 219.94,231.23 222.1,233.38 222.1,237.34 222.81,238.05 225.57,238.05
AN_OUTB_H
  Top 0.635: 213.16,162.14 211.21,162.14
  Top 1.27: 227.2,172.32 226.26,172.32 216.08,162.14 213.16,162.14
AN_OUTB_L  (1 unrouted)
  Top 0.635: 212.96,164.68 211.21,164.68
  Top 1.27: 215.28,164.68 222.33,171.73 222.33,172.06 222.02,172.06 | 215.15,164.68 212.96,164.68
AN_OUTC_H